# Altium PCB sensor_good.PcbDoc (part 1 of 3)
Units mil, origin at the board's own origin, x right, y up, seen from the top; angles counter-clockwise.
Board outline 3543.31 x 2755.91 mil, 6 copper layers (TOP, GND1, Sig1, Sig2, GND2, BOT), stack 32.112 mil thick; 126 components, 166 nets, 710 pads, 273 vias.
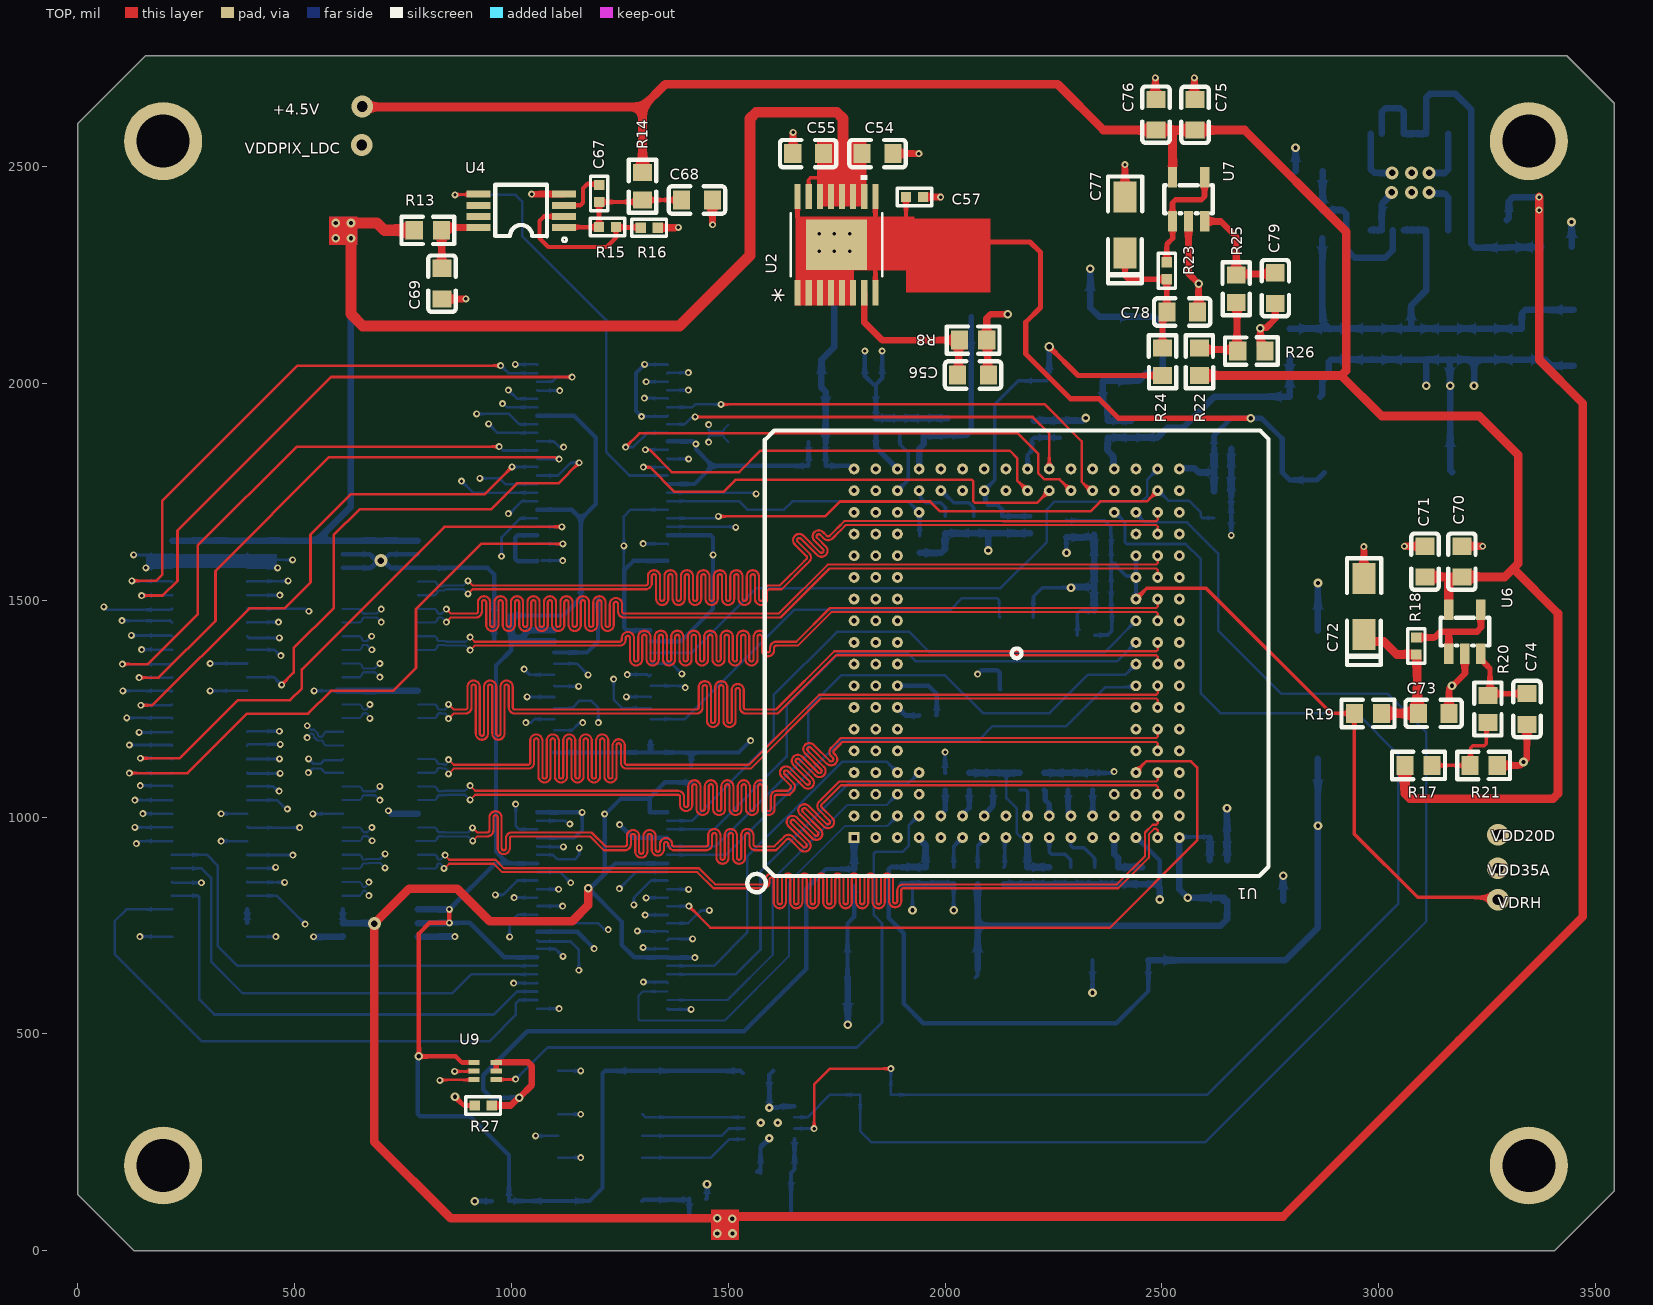
[diagram p0: TOP view]
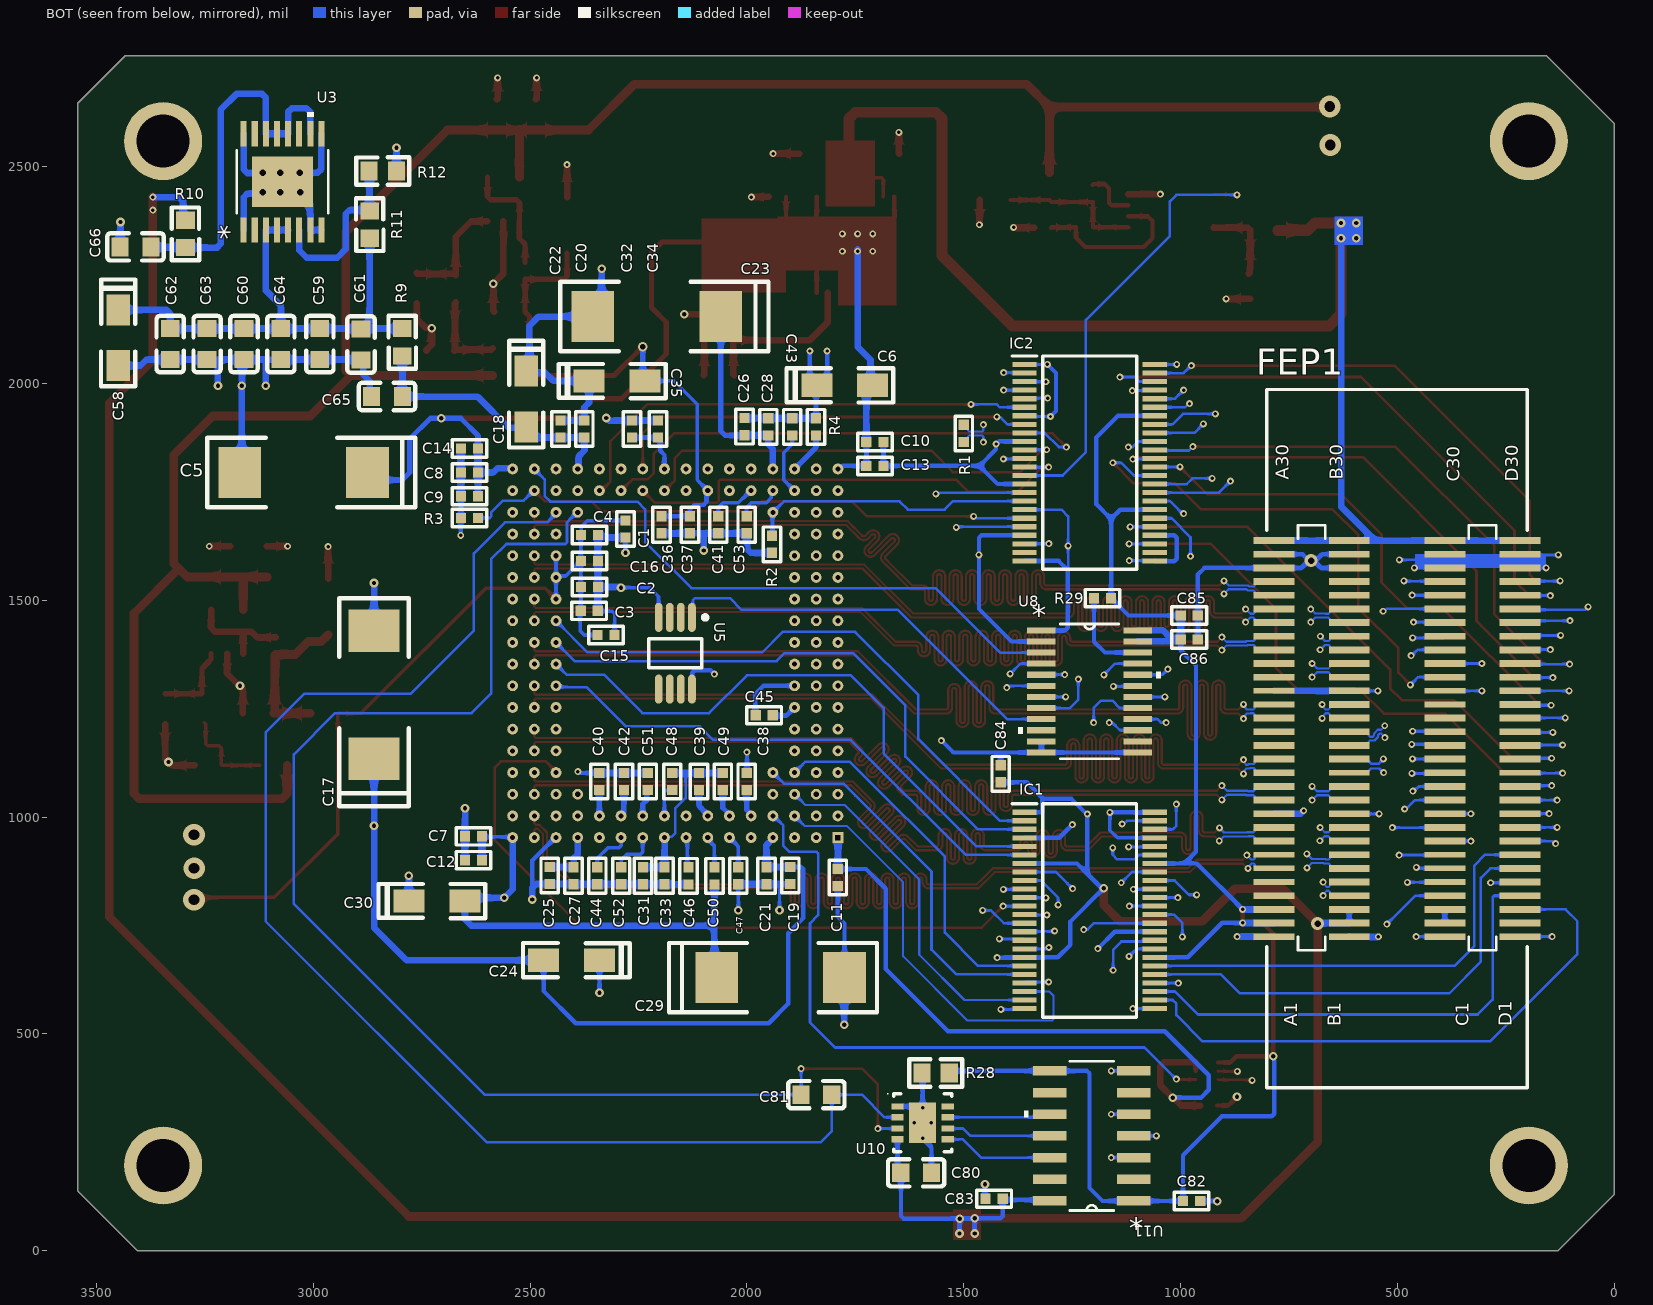
[diagram p1: BOT view, seen from below]
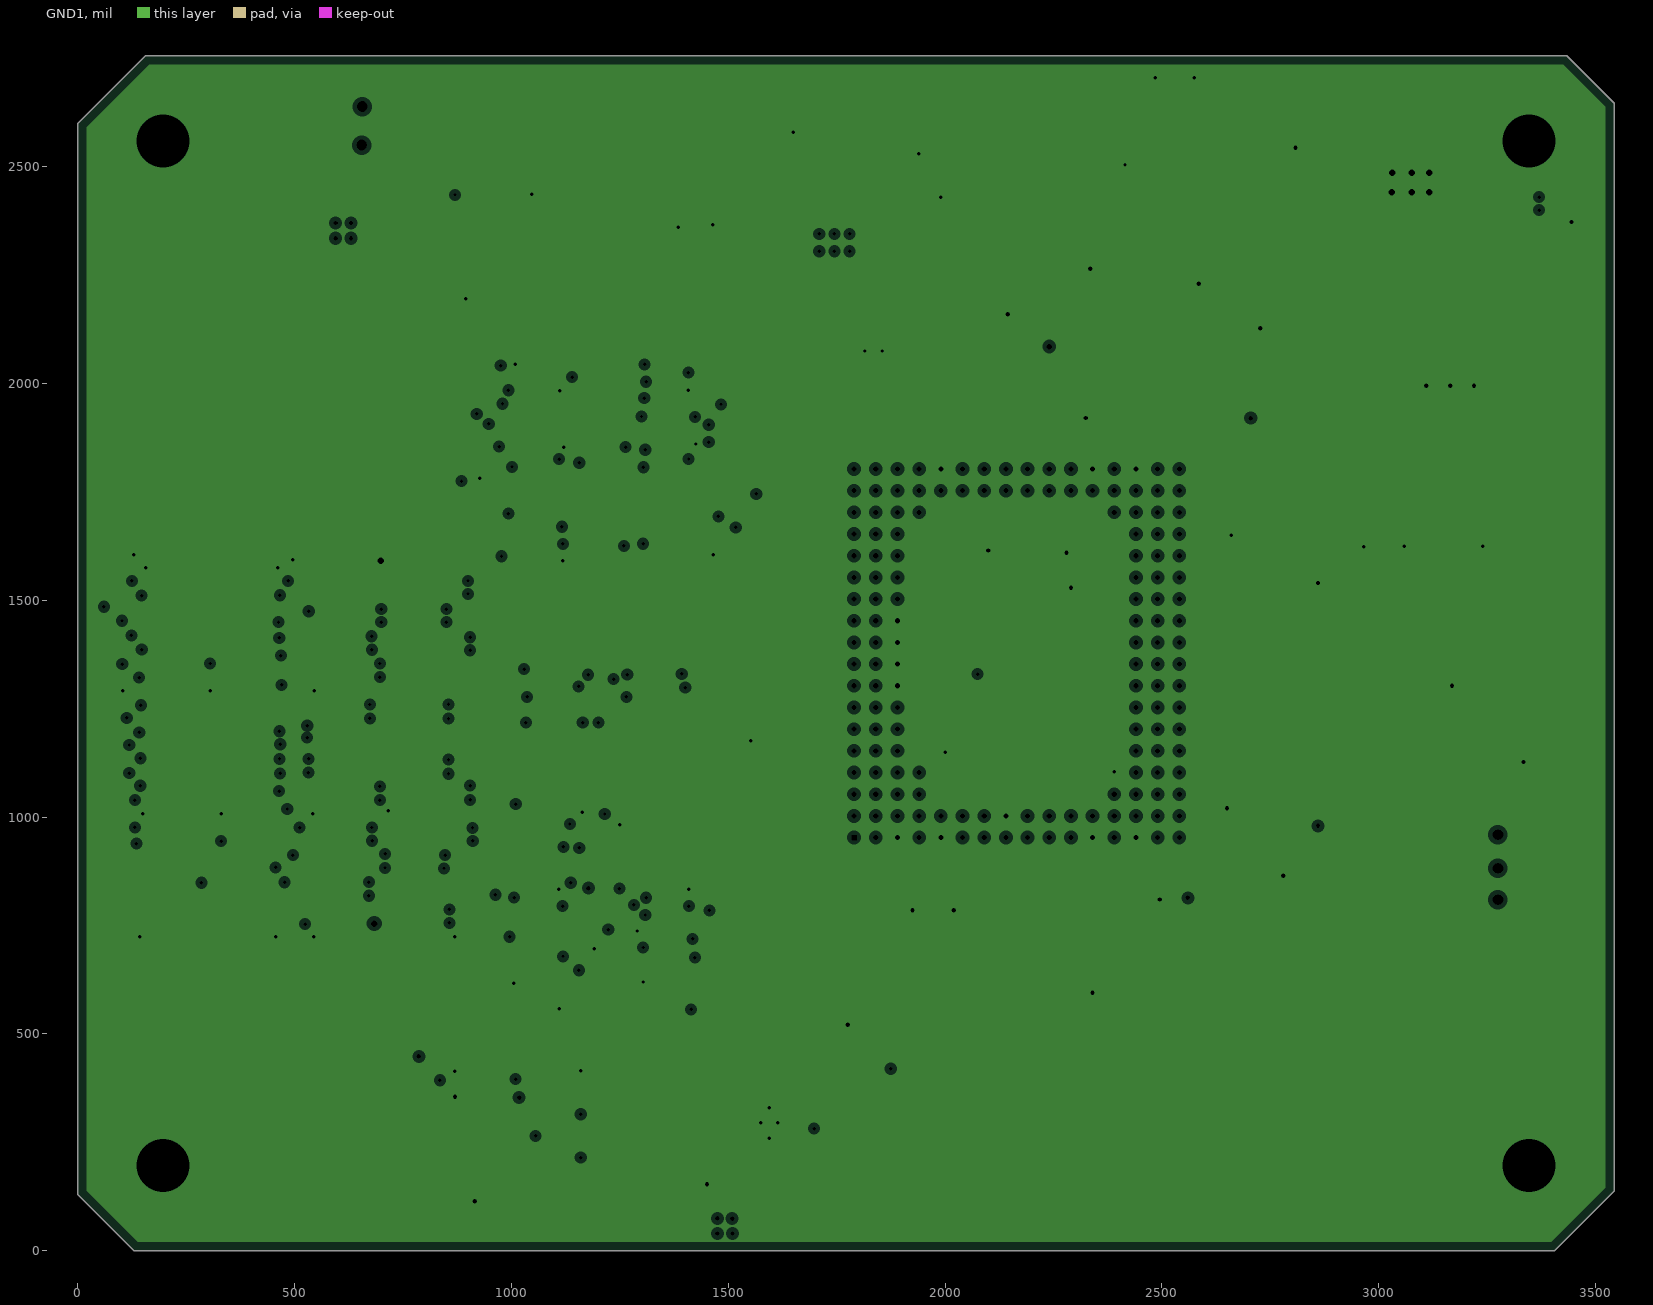
[diagram p2: GND1, clearances drawn from the general rule]
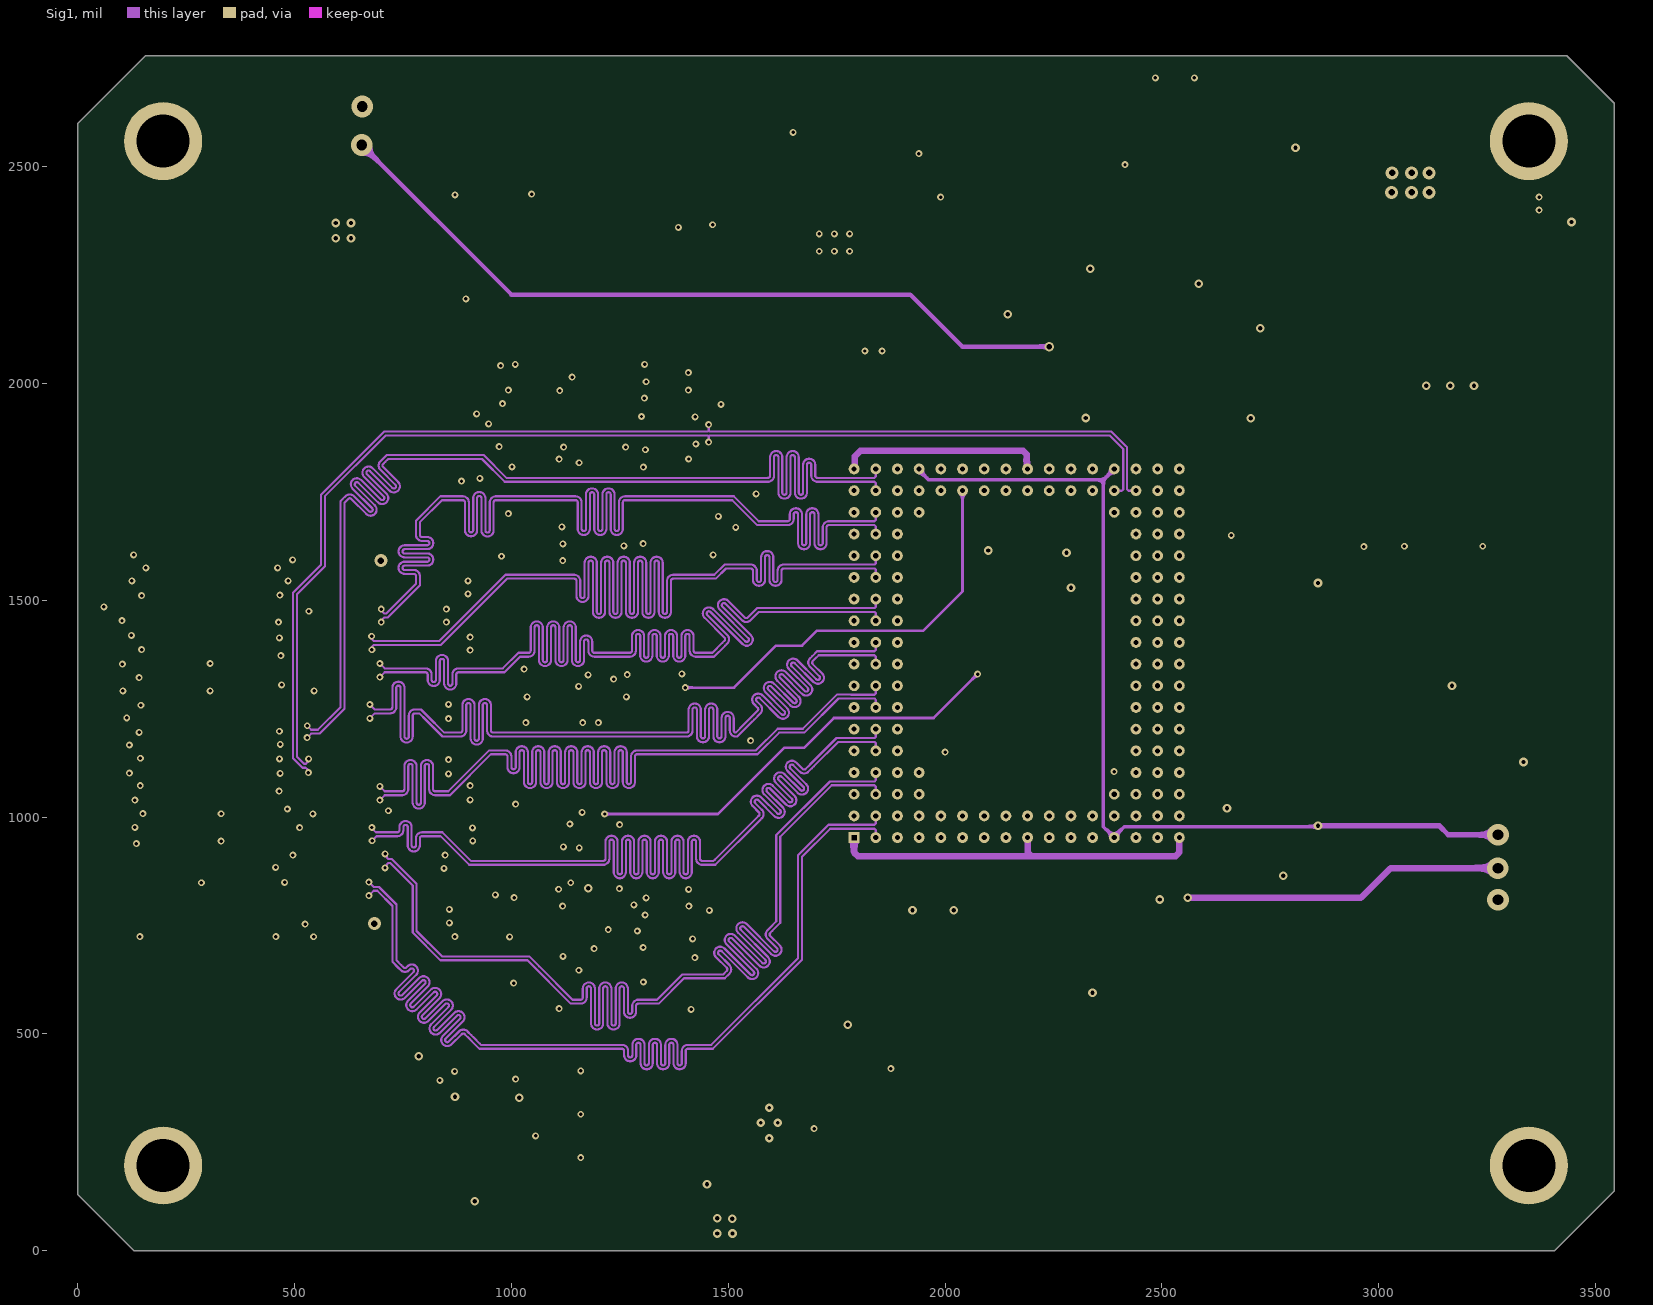
[diagram p3: Sig1]
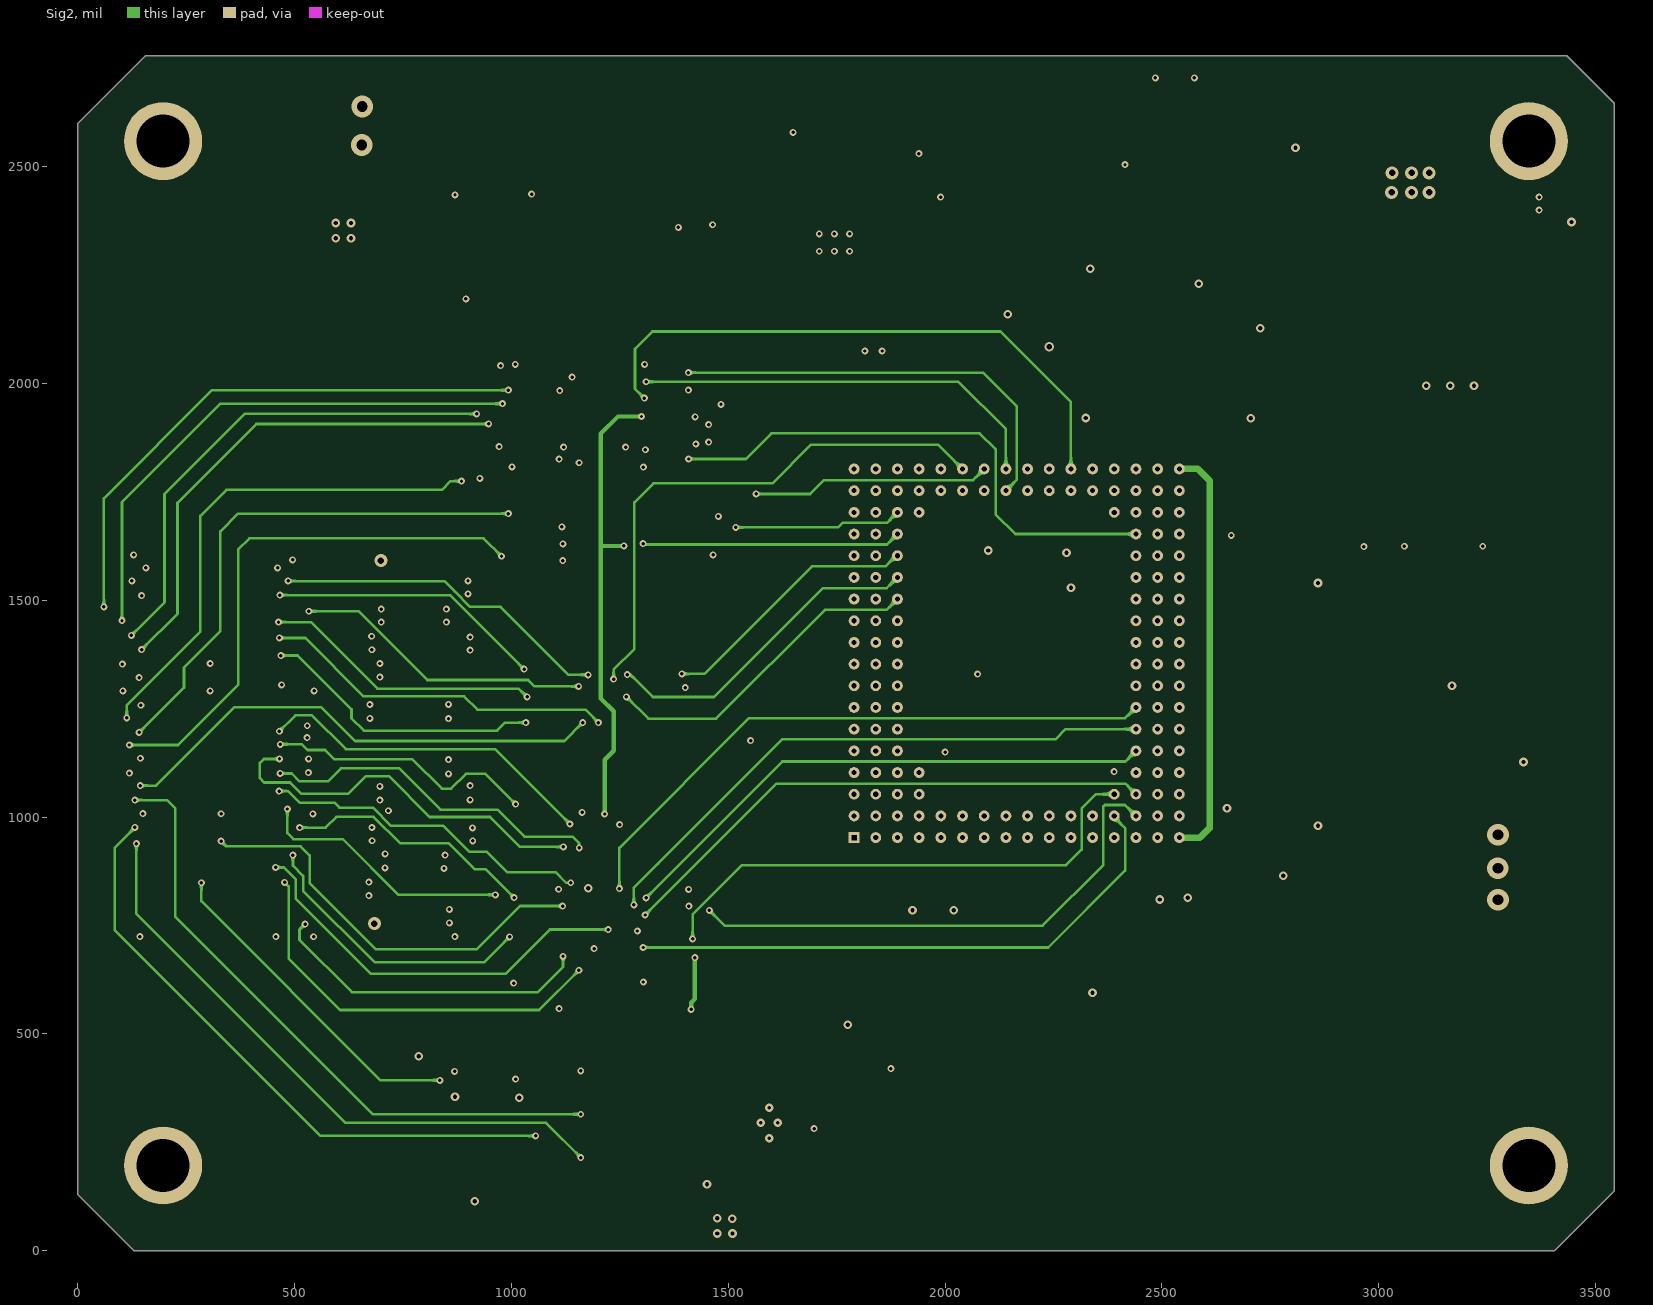
[diagram p4: Sig2]
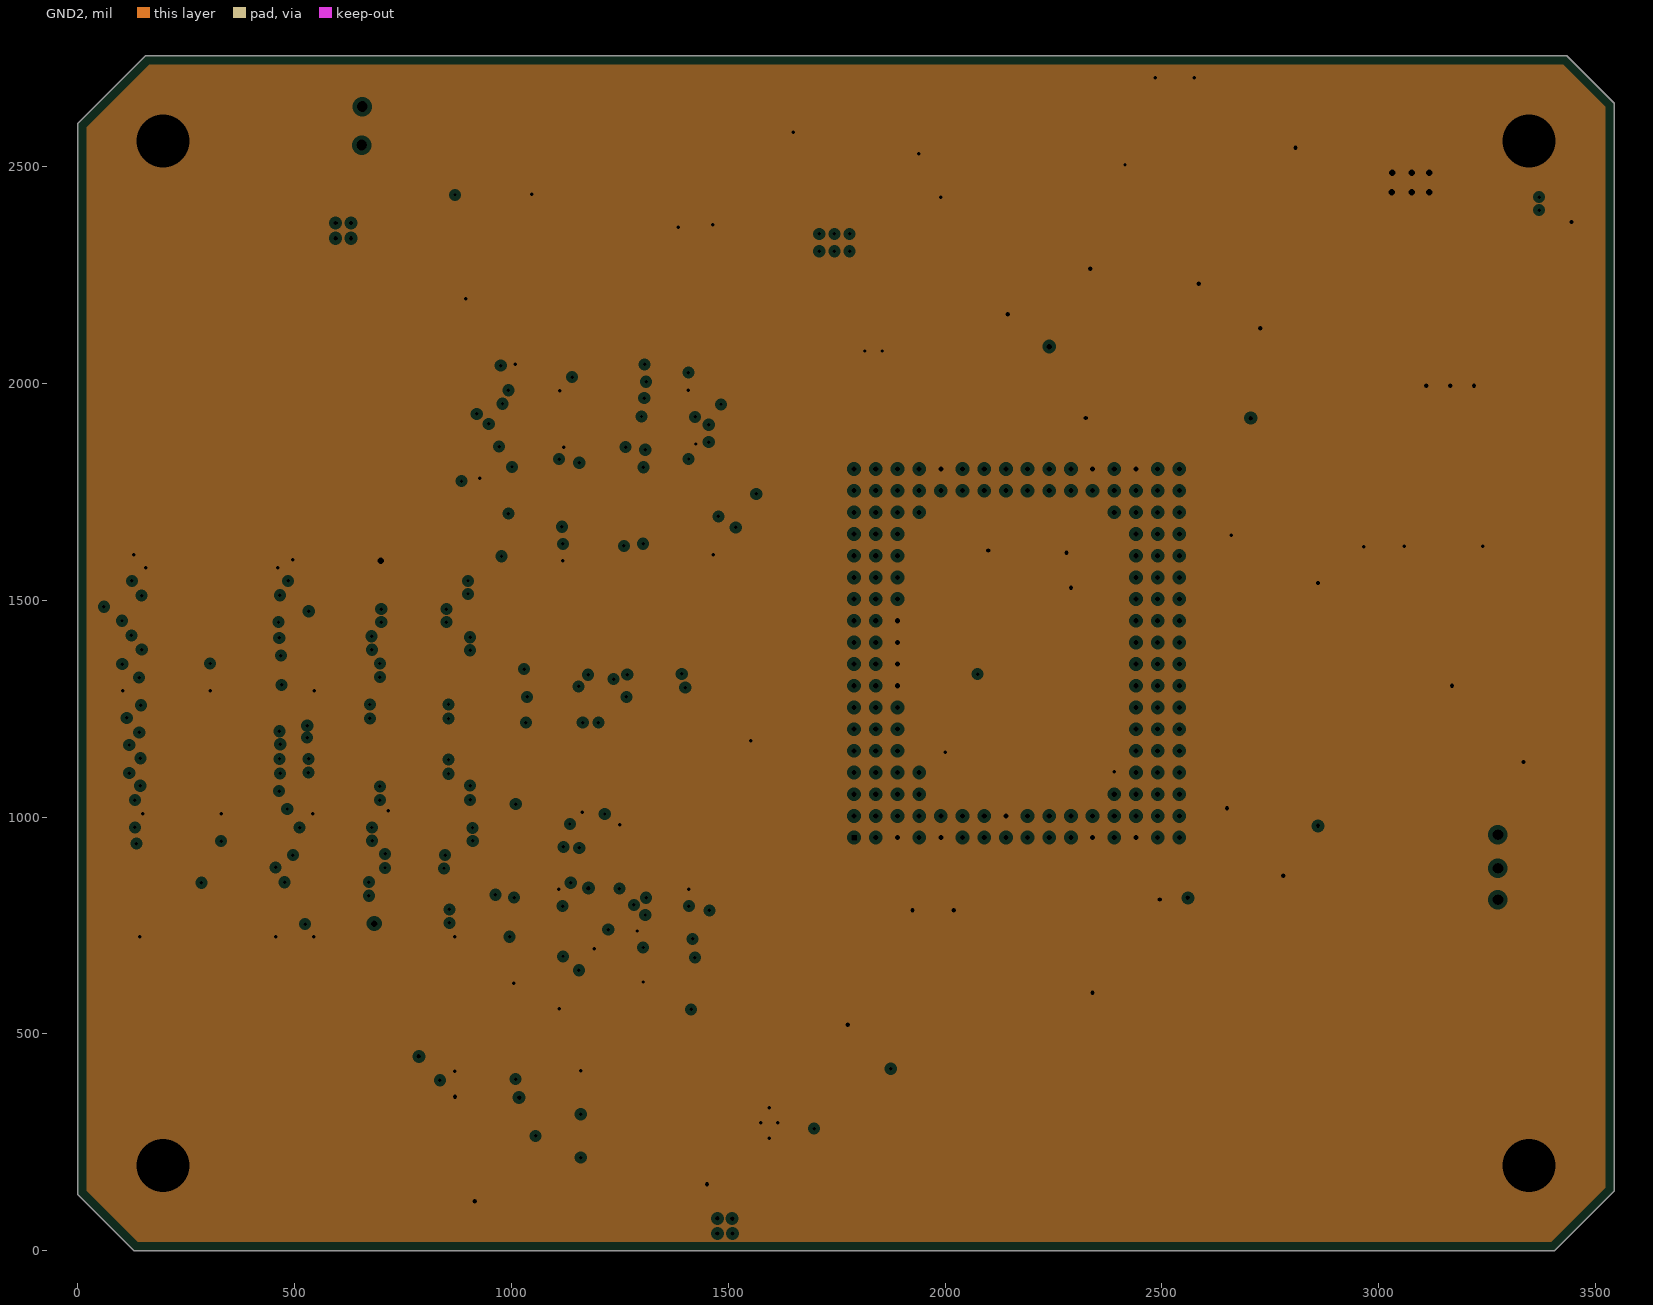
[diagram p5: GND2, clearances drawn from the general rule]

## Layer stack, top to bottom
Top Solder: solder mask 0.4, Solder Resist, Dk 3.5
TOP: signal copper 1.4
Dielectric 2: prepreg 2.8, PP-006, Dk 4.1
GND1: plane copper 1.378, net GND
Dielectric 4: prepreg 2.8, PP-006, Dk 4.1
Sig1: signal copper 1.378
Dielectric 1: dielectric 12.6, FR-4, Dk 4.8
Sig2: signal copper 1.378
Dielectric 5: prepreg 2.8, PP-006, Dk 4.1
GND2: plane copper 1.378, net GND
Dielectric 3: prepreg 2.8, PP-006, Dk 4.1
BOT: signal copper 1.4
Bottom Solder: solder mask 0.4, Solder Resist, Dk 3.5

## Board outline
130,0 0,130 0,2599.45 156.46,2755.91 3433.54,2755.91 3543.31,2646.14 3543.31,137.76 3405.55,0

## Design rules (kind name [scope] priority, off if disabled: settings)
Clearance Clearance_1 [All vs InNet('GND')] p1: gap=6 ignorepadtopadclearanceinfootprint=FALSE except(0: Arc-Hole Track-Hole Via-Hole Fill-Hole Poly-Hole Region-Hole Text-Hole; 4: Arc-Arc Arc-Track Arc-SMDPad Arc-THPad Track-Track Track-SMDPad Track-THPad; 5: SMDPad-SMDPad SMDPad-THPad THPad-THPad; 8: SMDPad-Hole)
Clearance [All] p2: gap=6 ignorepadtopadclearanceinfootprint=FALSE except(0: Arc-Hole Track-Hole Via-Hole Fill-Hole Poly-Hole Region-Hole Text-Hole; 4: Arc-Arc Arc-Track Track-Track; 5: Arc-SMDPad Arc-THPad Track-SMDPad Track-THPad; 8: SMDPad-Hole)
DiffPairsRouting [All] p1: maxlimit=10 minlimit=4 mostfreqgap=4 toplayer_minwidth=5 toplayer_maxwidth=15 toplayer_prefwidth=5 midlayer1_minwidth=5 midlayer1_maxwidth=15 midlayer1_prefwidth=5 midlayer2_minwidth=5 midlayer2_maxwidth=15 midlayer2_prefwidth=5 bottomlayer_minwidth=5 bottomlayer_maxwidth=15 bottomlayer_prefwidth=5 maxuncoupledlength=500
FanoutControl Fanout_Default [All] p5: bgadir=Out bgaviamode=Closest fanoutstyle=Rows fanoutdirection=OutOnly viagrid=1 // Fanout_Default (Default Rule)
HoleSize [All] p1: absolutevalues=TRUE maxlimit=200 minlimit=1 maxpercent=80.000 minpercent=20.000
HoleToHoleClearance [All] p1: gap=6 allowstackedmicrovias=TRUE
MinimumSolderMaskSliver [All] p1: minsoldermaskwidth=1.5
PlaneClearance diff [InNetClass('Diff')] p1: clearance=8
PlaneClearance Power [InNetClass('PWR')] p2: clearance=12
PlaneClearance signal [All] p3: clearance=10
PlaneConnect [All] p1: planeconnectstyle=Direct reliefexpansion=20 reliefentries=4 reliefconductorwidth=10 reliefairgap=10
PolygonConnect [All] p1: connectstyle=Direct reliefconductorwidth=10 reliefentries=4 polygonreliefangle="90 Angle" airgapwidth=10
RoutingVias [All] p1: holewidth=8 width=16 viastyle="Through Hole" minholewidth=6 minwidth=12 maxholewidth=28 maxwidth=50
SilkToSilkClearance [All] p1: silktosilkclearance=0
SilkToSolderMaskClearance [IsPad] p1: minsilkscreentomaskgap=0 clearancetoexposedcopper=TRUE
SolderMaskExpansion [All] p1: expansion=4 istentingtop=FALSE
UnRoutedNet [All] p1: checkbadconnections=TRUE
Width [All] p1: maxlimit=40 minlimit=5 preferedwidth=6 minimp=50.000000 maximp=50.000000 favimp=50.000000
20 further rules are at their usual default settings.

## Classes and differential pairs
net class Diff: CLKIN_N CLKIN_P CLKOUT_N CLKOUT_P OUT0_BOT_N OUT0_BOT_P OUT0_TOP_N OUT0_TOP_P OUT1_BOT_N OUT1_BOT_P OUT1_TOP_N OUT1_TOP_P OUT2_BOT_N OUT2_BOT_P OUT2_TOP_N OUT2_TOP_P OUT3_BOT_N OUT3_BOT_P OUT3_TOP_N OUT3_TOP_P OUT4_BOT_N OUT4_BOT_P OUT4_TOP_N OUT4_TOP_P OUT5_BOT_N OUT5_BOT_P OUT5_TOP_N OUT5_TOP_P OUT6_BOT_N OUT6_BOT_P OUT6_TOP_N OUT6_TOP_P OUT7_BOT_N OUT7_BOT_P OUT7_TOP_N OUT7_TOP_P
component class Sensor: C1 C2 C3 C4 C5 C6 C7 C8 C9 C10 C11 C12 C13 C14 C15 C16 C17 C18 C19 C20 C21 C22 C23 C24 C25 C26 C27 C28 C29 C30 C31 C32 C33 C34 C35 C36 C37 C38 C39 C40 C41 C42 C43 C44 C45 C46 C47 C48 C49 C50 C51 C52 C53 FEP1 q R1 R2 R3 R4
component class Sensor_Power_Supply: C54 C55 C56 C57 C58 C59 C60 C61 C62 C63 C64 C65 C66 C67 C68 C69 C70 C71 C72 C73 C74 C75 C76 C77 C78 C79 C80 C81 C82 C83 C84 C85 C86 IC1 IC2 R8 R9 R10 R11 R12 R13 R14 R15 R16 R17 R18 R19 R20 R21 R22 R23 R24 R25 R26 R27 R28 R29 U2 U3 U4 U5 U6 U7 U8 U9 U10 U11
differential pair OUT7_TOP: +OUT7_TOP_P -OUT7_TOP_N
differential pair OUT7_BOT: +OUT7_BOT_P -OUT7_BOT_N
differential pair OUT6_TOP: +OUT6_TOP_P -OUT6_TOP_N
differential pair OUT6_BOT: +OUT6_BOT_P -OUT6_BOT_N
differential pair OUT5_TOP: +OUT5_TOP_P -OUT5_TOP_N
differential pair OUT5_BOT: +OUT5_BOT_P -OUT5_BOT_N
differential pair OUT4_TOP: +OUT4_TOP_P -OUT4_TOP_N
differential pair OUT4_BOT: +OUT4_BOT_P -OUT4_BOT_N
differential pair OUT3_TOP: +OUT3_TOP_P -OUT3_TOP_N
differential pair OUT3_BOT: +OUT3_BOT_P -OUT3_BOT_N
differential pair OUT2_TOP: +OUT2_TOP_P -OUT2_TOP_N
differential pair OUT2_BOT: +OUT2_BOT_P -OUT2_BOT_N
differential pair OUT1_TOP: +OUT1_TOP_P -OUT1_TOP_N
differential pair OUT1_BOT: +OUT1_BOT_P -OUT1_BOT_N
differential pair OUT0_TOP: +OUT0_TOP_P -OUT0_TOP_N
differential pair OUT0_BOT: +OUT0_BOT_P -OUT0_BOT_N
differential pair CLKOUT: +CLKOUT_P -CLKOUT_N
differential pair CLKIN: +CLKIN_P -CLKIN_N

## Components (designator, comment, footprint, x,y, rotation, side; value= is the part's Value field where it differs from the comment)
C1 "4.7uF" CAP0402 2280,1664.69 r90 bottom
C2 "100nF" CAP0402 2363.23,1530.91 r0 bottom
C3 "4.7uF" CAP0402 2363.86,1475.91 r0 bottom
C4 "100nF" CAP0402 2363.23,1650.91 r0 bottom
C5 "470u" CAPPM3528X210N 3020,1800 r180 bottom
C6 "100uF" CASE-A_3216 1770,1995 r0 bottom
C7 "4.7uF" CAP0402 2630.71,955.91 r180 bottom
C8 "4.7uF" CAP0402 2640,1795 r180 bottom
C9 "4.7uF" CAP0402 2640,1740 r180 bottom
C10 "4.7uF" CAP0402 1705,1865 r0 bottom
C11 "100nF" CAP0402 1790.41,860.74 r90 bottom
C12 "100nF" CAP0402 2630.71,900.91 r180 bottom
C13 "100nF" CAP0402 1705,1810 r0 bottom
C14 "100nF" CAP0402 2640,1850 r180 bottom
C15 "4.7uF" CAP0402 2325,1420 r0 bottom
C16 "100nF" CAP0402 2363.23,1590.91 r0 bottom
C17 "470u" CAPPM3528X210N 2855,1280 r270 bottom
C18 "100uF" CASE-A_3216 2510,1960 r90 bottom
C19 "4.7uF" CAP0402 1900,865.31 r90 bottom
C20 "4.7uF" CAP0402 2375,1895 r270 bottom
C21 "100nF" CAP0402 1955,865 r90 bottom
C22 "100nF" CAP0402 2430,1895 r270 bottom
C23 "470uF" CAPPM3528X210N 2205.4,2159.45 r180 bottom
C24 "100uF" CASE-A_3216 2409,671 r180 bottom
C25 "4.7uF" CAP0402 2455,865.31 r90 bottom
C26 "4.7uF" CAP0402 2005.71,1900.59 r270 bottom
C27 "100nF" CAP0402 2400,865 r90 bottom
C28 "100nF" CAP0402 1950.71,1900.08 r270 bottom
C29 "470u" CAPPM3528X210N 1925,625 r0 bottom
C30 "100uF" CASE-A_3216 2710.71,805.91 r0 bottom
C31 "4.7uF" CAP0402 2240,865 r90 bottom
C32 "4.7uF" CAP0402 2265,1895 r270 bottom
C33 "100nF" CAP0402 2190,865 r90 bottom
C34 "100nF" CAP0402 2205,1895 r270 bottom
C35 "100uF" CASE-A_3216 2295,2005 r0 bottom
C36 "4.7uF" CAP0402 2197.07,1674.25 r90 bottom
C37 "100nF" CAP0402 2131.62,1674.25 r90 bottom
C38 "100nF" CAP0402 2000.71,1082.33 r90 bottom
C39 "1uF" CAP0402 2110.71,1082.33 r90 bottom
C40 "1uF" CAP0402 2340.48,1082.33 r90 bottom
C41 "100nF" CAP0402 2066.16,1674.25 r270 bottom
C42 "1uF" CAP0402 2283.86,1082.33 r90 bottom
C43 "100nF" CAP0402 1895.71,1900.08 r90 bottom
C44 "1uF" CAP0402 2345,865 r270 bottom
C45 "100nF" CAP0402 1960.31,1235 r0 bottom
C46 "1uF" CAP0402 2135,864.69 r270 bottom
C47 "100nF" CAP0402 2020,865 r270 bottom
C48 "100nF" CAP0402 2172.29,1082.33 r90 bottom
C49 "100nF" CAP0402 2055.71,1082.33 r90 bottom
C50 "1uF" CAP0402 2075,864.69 r270 bottom
C51 "100nF" CAP0402 2228.59,1082.33 r90 bottom
C52 "100nF" CAP0402 2290,865 r270 bottom
C53 "100nF" CAP0402 2000.71,1674.25 r270 bottom
C54 "4.7uF" C0603 1844.25,2530.16 r180 top
C55 "10uF" C0603 1684.25,2530.16 r0 top
C56 "100nF" C0603 2064.69,2019.61 r180 top
C57 "10uF" CAP0402 1929.69,2430.16 r180 top
C58 "150uF" CASE-A_3216 3451,2101 r90 bottom
C59 "1uF" C0603 2985,2091 r90 bottom
C60 "1uF" C0603 3160,2091 r90 bottom
C61 "1uF" C0603 2890,2090 r90 bottom
C62 "1uF" C0603 3330,2091 r90 bottom
C63 "1uF" C0603 3245,2091 r90 bottom
C64 "1uF" C0603 3075,2091 r90 bottom
C65 "1uF" C0603 2830,1970 r180 bottom
C66 "10uF" C0603 3410,2315 r180 bottom
C67 "10nF" CAP0402 1202.5,2438.2 r90 top
C68 "10uF" C0603 1427.93,2423.2 r0 top
C69 "1uF" C0603 840,2230.43 r90 top
C70 "100nF" C0603 3191.89,1589.37 r270 top
C71 "4.7uF" C0603 3106.89,1589.37 r270 top
C72 "33uF" CASE-A_3216 2966.89,1489.92 r270 top
C73 "4.7uF" C0603 3126.89,1239.37 r180 top
C74 "4.7uF" C0603 3341.89,1249.37 r90 top
C75 "100nF" C0603 2576.55,2619.57 r270 top
C76 "4.7uF" C0603 2486.55,2620 r270 top
C77 "33uF" CASE-A_3216 2416,2370 r270 top
C78 "4.7uF" C0603 2546.99,2165 r180 top
C79 "4.7uF" C0603 2761.55,2220 r90 top
C80 "100nF" C0603 1610,180 r0 bottom
C81 "2200p" C0603 1840,360 r0 bottom
C82 "1uF" CAP0402 974.69,115 r0 bottom
C83 "1uF" CAP0402 1430,120 r180 bottom
C84 "100nF" CAP0402 1415,1100 r270 bottom
C85 "1uF" CAP0402 980,1465 r0 bottom
C86 "100nF" CAP0402 980,1410 r0 bottom
FEP1 "FEP" "FEP-X2 NO PAD" 500.94,488.19 r0 bottom locked
IC1 "74ALVC164245DGG,11" SOP50P810X120-48N 1210,785 r180 bottom
IC2 "74ALVC164245DGG,11" SOP50P810X120-48N 1209.92,1817.32 r180 bottom
R1 "100R  1%" RES0402 1500,1885 r90 bottom value=10K
R2 "1k" RES0402 1942.11,1629.21 r270 bottom value=10K
R3 "0R" RES0402 2640,1690 r0 bottom value=10K
R4 "0R" RES0402 1840.71,1900.08 r90 bottom value=10K
R8 "10k 1%" R0603 2064.69,2100.16 r180 top
R9 "0R" R0603 2795,2095 r270 bottom
R10 "0R" R0603 3295,2345 r270 bottom
R11 "1.3k" R0603 2870,2366.49 r270 bottom
R12 "2k" R0603 2840,2490 r0 bottom
R13 "0R" R0603 807.5,2353.2 r0 top
R14 "0R" R0603 1302.5,2454.7 r90 top
R15 "2.7k" RES0402 1221.57,2361 r180 top
R16 "1k" RES0402 1317.79,2359.21 r180 top
R17 "18k" R0603 3091.89,1119.37 r180 top
R18 "0R" RES0402 3086.89,1394.69 r270 top
R19 "0R" R0603 2975.4,1239.37 r180 top
R20 "47k" R0603 3251.89,1249.37 r90 top
R21 "100k" R0603 3241.89,1119.37 r180 top
R22 "100k" R0603 2586.55,2050 r270 top
R23 "0R" RES0402 2511.55,2260 r270 top
R24 "0R" R0603 2501.55,2050 r270 top
R25 "47k" R0603 2671.55,2218.51 r90 top
R26 "22k" R0603 2706.55,2075 r180 top
R27 "18k" RES0402 935,335 r0 top
R28 "18k" R0603 1565,410 r180 bottom
R29 "18k" RES0402 1180,1505 r180 bottom
U1 "G200BSI" "ANDON SOCKET" 2165.35,1377.95 r90 top locked
U2 "lt3083efe#trpbf" TSSOP-16_FE/BB 1749.69,2320.16 r90 top
U3 "lt1764efe#trpbf" TSSOP-16_FE/BB 3071,2465 r90 bottom
U4 "LT1962EMS8#PBF" MSOP-8_L3.0-W3.0-P0.65-LS5.0-TL 1022.5,2398.2 r180 top
U5 "DS18B20U+" MAXM-U8+1_N 2165.35,1377.95 r270 bottom
U6 "LT6220IS5" SOT23-5 3198.67,1427.75 r0 top
U7 "LT6220IS5" SOT23-5 2561.55,2425 r0 top
U8 "AVC8T245PWR-D" PW24 1210,1290 r180 bottom
U9 "TXS0101DRLR" DRL6 939.41,414.69 r0 top
U10 "MAX6627MTA+T" MAXM-T833+2_V 1595,295 r180 bottom
U11 "TXS0104ED" D14 1205,265 r0 bottom

## Footprints (in the part's own frame and the unit in brackets; to place one, negate y for a bottom-side part, rotate by r counter-clockwise, add the part's x,y. Pads: shape width x height; smd on the part's side, far side on the other; paste and mask are expansions set on the pad)
"ANDON SOCKET" [mm] "10-18-04A-153-414T4-R27-L14"
  rect 0.635x0.635 hole 0.3 square: A1(-10.795,9.525)
  round 0.635 hole 0.3: A2(-9.525,9.525) A3(-8.255,9.525) A4(-6.985,9.525) A5(-5.715,9.525) A6(-4.445,9.525) A7(-3.175,9.525) A8(-1.905,9.525) A9(-0.635,9.525) A10(0.635,9.525) A11(1.905,9.525) A12(3.175,9.525) A13(4.445,9.525) A14(5.715,9.525) A15(6.985,9.525) A16(8.255,9.525) A17(9.525,9.525) A18(10.795,9.525) B1(-10.795,8.255) B2(-9.525,8.255) B3(-8.255,8.255) B4(-6.985,8.255) B5(-5.715,8.255) B6(-4.445,8.255) B7(-3.175,8.255) B8(-1.905,8.255) B9(-0.635,8.255) B10(0.635,8.255) B11(1.905,8.255) B12(3.175,8.255) B13(4.445,8.255) B14(5.715,8.255) B15(6.985,8.255) B16(8.255,8.255) B17(9.525,8.255) B18(10.795,8.255) C1(-10.795,6.985) C2(-9.525,6.985) C3(-8.255,6.985) C4(-6.985,6.985) C5(-5.715,6.985) C6(-4.445,6.985) C7(-3.175,6.985) C8(-1.905,6.985) C9(-0.635,6.985) C10(0.635,6.985) C11(1.905,6.985) C12(3.175,6.985) C13(4.445,6.985) C14(5.715,6.985) C15(6.985,6.985) C16(8.255,6.985) C17(9.525,6.985) C18(10.795,6.985) D1(-10.795,5.715) D2(-9.525,5.715) D3(-8.255,5.715) D4(-6.985,5.715) D16(8.255,5.715) D17(9.525,5.715) D18(10.795,5.715) E1(-10.795,4.445) E2(-9.525,4.445) E17(9.525,4.445) E18(10.795,4.445) F1(-10.795,3.175) F2(-9.525,3.175) F17(9.525,3.175) F18(10.795,3.175) G1(-10.795,1.905) G2(-9.525,1.905) G17(9.525,1.905) G18(10.795,1.905) H1(-10.795,0.635) H2(-9.525,0.635) H17(9.525,0.635) H18(10.795,0.635) J1(-10.795,-0.635) J2(-9.525,-0.635) J17(9.525,-0.635) J18(10.795,-0.635) K1(-10.795,-1.905) K2(-9.525,-1.905) K17(9.525,-1.905) K18(10.795,-1.905) L1(-10.795,-3.175) L2(-9.525,-3.175) L17(9.525,-3.175) L18(10.795,-3.175) M1(-10.795,-4.445) M2(-9.525,-4.445) M17(9.525,-4.445) M18(10.795,-4.445) N1(-10.795,-5.715) N2(-9.525,-5.715) N3(-8.255,-5.715) N16(8.255,-5.715) N17(9.525,-5.715) N18(10.795,-5.715) P1(-10.795,-6.985) P2(-9.525,-6.985) P3(-8.255,-6.985) P4(-6.985,-6.985) P5(-5.715,-6.985) P6(-4.445,-6.985) P7(-3.175,-6.985) P8(-1.905,-6.985) P9(-0.635,-6.985) P10(0.635,-6.985) P11(1.905,-6.985) P12(3.175,-6.985) P13(4.445,-6.985) P14(5.715,-6.985) P15(6.985,-6.985) P16(8.255,-6.985) P17(9.525,-6.985) P18(10.795,-6.985) R1(-10.795,-8.255) R2(-9.525,-8.255) R3(-8.255,-8.255) R4(-6.985,-8.255) R5(-5.715,-8.255) R6(-4.445,-8.255) R7(-3.175,-8.255) R8(-1.905,-8.255) R9(-0.635,-8.255) R10(0.635,-8.255) R11(1.905,-8.255) R12(3.175,-8.255) R13(4.445,-8.255) R14(5.715,-8.255) R15(6.985,-8.255) R16(8.255,-8.255) R17(9.525,-8.255) R18(10.795,-8.255) T1(-10.795,-9.525) T2(-9.525,-9.525) T3(-8.255,-9.525) T4(-6.985,-9.525) T5(-5.715,-9.525) T6(-4.445,-9.525) T7(-3.175,-9.525) T8(-1.905,-9.525) T9(-0.635,-9.525) T10(0.635,-9.525) T11(1.905,-9.525) T12(3.175,-9.525) T13(4.445,-9.525) T14(5.715,-9.525) T15(6.985,-9.525) T16(8.255,-9.525) T17(9.525,-9.525) T18(10.795,-9.525)
  silkscreen extent -14,-14.75 13.05,15.78
C0603 [mm]
  rect 1x1.1 smd: 1(-0.9,0) 2(0.9,0)
  silkscreen extent -1.65,-0.8 1.65,0.8
CAP0402 [mm]
  rect 0.6x0.6 smd: 1(-0.5,0) 2(0.5,0)
  silkscreen extent -1.02,-0.51 1.02,0.51, body extent -0.55,-0.3 0.55,0.3, height 0.6
CAPPM3528X210N [mm]
  rect 2.5x3 smd: 1(3.683,-0.127) 2(-3.81,-0.127)
  silkscreen extent -5.71,-2.16 6.48,1.91
CASE-A_3216 [mil]
  rect 71.5x53.5 smd: 1(69,-1) 2(-60,-1)
  silkscreen extent -107,-40 139,39
D14 [mil]
  rect 78x22 smd: 1(-97,150) 2(-97,100) 3(-97,50) 4(-97,0) 5(-97,-50) 6(-97,-100) 7(-97,-150) 8(97,-150) 9(97,-100) 10(97,-50) 11(97,0) 12(97,50) 13(97,100) 14(97,150)
  silkscreen extent -51,-172 156,172, body extent 0,0 10,10, height 10
DRL6 [mm]
  rect 0.654x0.301 smd: 1(-0.65,0.5) 2(-0.65,0) 3(-0.65,-0.5) 4(0.65,-0.5) 5(0.65,0) 6(0.65,0.5)
  body extent 0,0 0.25,0.25, height 0.25
"FEP-X2 NO PAD" [mm]
  rect 2.4x0.4 smd: A1(7.2,-6) A2(7.2,-6.8) A3(7.2,-7.6) A4(7.2,-8.4) A8(7.2,-11.6) A9(7.2,-12.4) A10(7.2,-13.2) A11(7.2,-14) A12(7.2,-14.8) A13(7.2,-15.6) A14(7.2,-16.4) A15(7.2,-17.2) A16(7.2,-18) A17(7.2,-18.8) A20(7.2,-21.2) A21(7.2,-22) A22(7.2,-22.8) A23(7.2,-23.6) A24(7.2,-24.4) A25(7.2,-25.2) A26(7.2,-26) A27(7.2,-26.8) A28(7.2,-27.6) A29(7.2,-28.4) A30(7.2,-29.2) B1(2.8,-6) B2(2.8,-6.8) B3(2.8,-7.6) B4(2.8,-8.4) B5(2.8,-9.2) B6(2.8,-10) B7(2.8,-10.8) B8(2.8,-11.6) B9(2.8,-12.4) B10(2.8,-13.2) B11(2.8,-14) B12(2.8,-14.8) B14(2.8,-16.4) B15(2.8,-17.2) B16(2.8,-18) B17(2.8,-18.8) B18(2.8,-19.6) B19(2.8,-20.4) B20(2.8,-21.2) B21(2.8,-22) B22(2.8,-22.8) B23(2.8,-23.6) B24(2.8,-24.4) B25(2.8,-25.2) B26(2.8,-26) B27(2.8,-26.8) B28(2.8,-27.6) B29(2.8,-28.4) B30(2.8,-29.2) C1(-2.8,-6) C2(-2.8,-6.8) C3(-2.8,-7.6) C4(-2.8,-8.4) C8(-2.8,-11.6) C9(-2.8,-12.4) C10(-2.8,-13.2) C11(-2.8,-14) C12(-2.8,-14.8) C13(-2.8,-15.6) C14(-2.8,-16.4) C15(-2.8,-17.2) C16(-2.8,-18) C17(-2.8,-18.8) C20(-2.8,-21.2) C21(-2.8,-22) C22(-2.8,-22.8) C23(-2.8,-23.6) C24(-2.8,-24.4) C25(-2.8,-25.2) C26(-2.8,-26) C27(-2.8,-26.8) C28(-2.8,-27.6) C29(-2.8,-28.4) C30(-2.8,-29.2) D1(-7.2,-6) D2(-7.2,-6.8) D3(-7.2,-7.6) D4(-7.2,-8.4) D5(-7.2,-9.2) D6(-7.2,-10) D7(-7.2,-10.8) D8(-7.2,-11.6) D9(-7.2,-12.4) D10(-7.2,-13.2) D11(-7.2,-14) D12(-7.2,-14.8) D14(-7.2,-16.4) D15(-7.2,-17.2) D16(-7.2,-18) D17(-7.2,-18.8) D18(-7.2,-19.6) D19(-7.2,-20.4) D20(-7.2,-21.2) D21(-7.2,-22) D22(-7.2,-22.8) D23(-7.2,-23.6) D24(-7.2,-24.4) D25(-7.2,-25.2) D26(-7.2,-26) D27(-7.2,-26.8) D28(-7.2,-27.6) D29(-7.2,-28.4) D30(-7.2,-29.2)
  rect 2.4x0.33 smd: A5(7.2,-9.2) A6(7.2,-10) A7(7.2,-10.8) A18(7.2,-19.6) A19(7.2,-20.4) B13(2.8,-15.6) C5(-2.8,-9.2) C6(-2.8,-10) C7(-2.8,-10.8) C18(-2.8,-19.6) C19(-2.8,-20.4) D13(-7.2,-15.6)
  silkscreen extent -7.62,-38.05 7.62,2.85
MAXM-T833+2_V [mil]
  rect 28.5x14.5 smd: 1(-58,38) 2(-58,13) 3(-58,-13) 4(-58,-38) 5(58,-38) 6(58,-13) 7(58,13) 8(58,38)
  rect 62.5x93.5 smd: 9(0,0)
  silkscreen extent -81,-67 67,67
MAXM-U8+1_N [mm] "SOP, 8-Leads, Body 3x3mm, Pitch 0.65mm, IPC Medium Density"
  oval 1.7x0.45 smd: 1(-2.1,0.975) 2(-2.1,0.325) 3(-2.1,-0.325) 4(-2.1,-0.975) 5(2.1,-0.975) 6(2.1,-0.325) 7(2.1,0.325) 8(2.1,0.975)
  silkscreen extent -2.22,-1.55 0.85,1.87, body extent -1.55,-1.55 1.55,1.55, height 1.1
MSOP-8_L3.0-W3.0-P0.65-LS5.0-TL [mil]
  rect 55x16 smd: 1(-98.5,38.39) 2(-98.5,12.8) 3(-98.5,-12.8) 4(-98.5,-38.39) 5(98.5,-38.39) 6(98.5,-12.8) 7(98.5,12.8) 8(98.5,38.39)
  silkscreen extent -105,-60 60,72
PW24 [mil]
  rect 66x14 smd: 1(-111,140.75) 2(-111,115.16) 3(-111,89.57) 4(-111,63.98) 5(-111,38.39) 6(-111,12.8) 7(-111,-12.8) 8(-111,-38.39) 9(-111,-63.98) 10(-111,-89.57) 11(-111,-115.16) 12(-111,-140.75) 13(111,-140.75) 14(111,-115.16) 15(111,-89.57) 16(111,-63.98) 17(111,-38.39) 18(111,-12.8) 19(111,12.8) 20(111,38.39) 21(111,63.98) 22(111,89.57) 23(111,115.16) 24(111,140.75)
  silkscreen extent -164,-156 164,156, body extent 0,0 10,10, height 10
R0603 [mm]
  rect 1x1.1 smd: 1(-0.8,0) 2(0.8,0)
  silkscreen extent -1.55,-0.8 1.55,0.81
RES0402 [mm]
  rect 0.6x0.6 smd: 1(-0.5,0) 2(0.5,0)
  silkscreen extent -1.02,-0.51 1.02,0.51, body extent -0.55,-0.3 0.55,0.3, height 0.6
SOP50P810X120-48N [mm]
  rect 1.425x0.3 smd: 1(-3.812,5.75) 2(-3.812,5.25) 3(-3.812,4.75) 4(-3.812,4.25) 5(-3.812,3.75) 6(-3.812,3.25) 7(-3.812,2.75) 8(-3.812,2.25) 9(-3.812,1.75) 10(-3.812,1.25) 11(-3.812,0.75) 12(-3.812,0.25) 13(-3.812,-0.25) 14(-3.812,-0.75) 15(-3.812,-1.25) 16(-3.812,-1.75) 17(-3.812,-2.25) 18(-3.812,-2.75) 19(-3.812,-3.25) 20(-3.812,-3.75) 21(-3.812,-4.25) 22(-3.812,-4.75) 23(-3.812,-5.25) 24(-3.812,-5.75) 25(3.812,-5.75) 26(3.812,-5.25) 27(3.812,-4.75) 28(3.812,-4.25) 29(3.812,-3.75) 30(3.812,-3.25) 31(3.812,-2.75) 32(3.812,-2.25) 33(3.812,-1.75) 34(3.812,-1.25) 35(3.812,-0.75) 36(3.812,-0.25) 37(3.812,0.25) 38(3.812,0.75) 39(3.812,1.25) 40(3.812,1.75) 41(3.812,2.25) 42(3.812,2.75) 43(3.812,3.25) 44(3.812,3.75) 45(3.812,4.25) 46(3.812,4.75) 47(3.812,5.25) 48(3.812,5.75)
  silkscreen extent -4.52,-6.25 2.75,6.25, body extent -4.05,-6.25 4.05,6.25, height 1.2
SOT23-5 [mil]
  rect 21.7x47.2 smd: 1(-37,-51) 2(0,-51) 3(37,-51) 4(37,51) 5(-37,51)
  silkscreen extent -56,-32 56,32
TSSOP-16_FE/BB [mil]
  rect 58x14 smd: 1(-111,89.6) 2(-111,64) 3(-111,38.4) 4(-111,12.8) 5(-111,-12.8) 6(-111,-38.4) 7(-111,-64) 8(-111,-89.6) 9(111,-89.6) 10(111,-64) 11(111,-38.4) 12(111,-12.8) 13(111,12.8) 14(111,38.4) 15(111,64) 16(111,89.6)
  rect 116x141 smd paste-70: EPAD(0,0)
  silkscreen extent -72,-106 160,106, body extent 0,0 10,10, height 10

## Part data
C1 C3 C7 C8 C9 C10 C15 C19 C20 C25 C26 C31 C32 C36 C71 C73 C74 C76 C78 C79: library part 4.7u, Contributor=LCEDA_Lib, nameAlias=Value(F), spicePre=C, spiceSymbolName=C_0603_US
C2 C4 C11 C12 C13 C14 C16 C21 C22 C27 C28 C30 C33 C34 C35 C37 C38 C41 C43 C45 C47 C48 C49 C51 C52 C53 C70 C75 C80: library part 100n, Contributor=LCEDA_Lib, nameAlias=Value(F), spicePre=C, spiceSymbolName=C_0603_US
C23: library part 470u
C39 C40 C42 C44 C46 C50 C59 C60 C61 C62 C63 C64 C65 C69 C82 C83 C84 C85 C86: library part 1u, Contributor=LCEDA_Lib, nameAlias=Value(F), spicePre=C, spiceSymbolName=C_0603_US
C54 C55 C56 C57 C66 C68: library part 10u, Contributor=LCEDA_Lib, nameAlias=Value(F), spicePre=C, spiceSymbolName=C_0603_US
C58: library part 150u, Contributor=LCEDA_Lib, nameAlias=Value(F), spicePre=C, spiceSymbolName=C_Tan_SMD_A_US
C67: library part 10n, Contributor=LCEDA_Lib, nameAlias=Value(F), spicePre=C, spiceSymbolName=C_0603_US
C72 C77: library part 33u, Contributor=LCEDA_Lib, nameAlias=Value(F), spicePre=C, spiceSymbolName=C_Tan_SMD_A_US
FEP1: library part FEP-2X
IC1 IC2: "Integrated Circuit", Manufacturer_Name=Nexperia, Mouser Part Number=771-74ALVC16424, Arrow Part Number=74ALVC164245DGG,11, Arrow Price/Stock=https://www.arrow.com/en/products/74alvc164245dgg11/nexperia, Datasheet Link=https://assets.nexperia.com/documents/data-sheet/74ALVC164245.pdf, Height=1.2mm, Manufacturer_Part_Number=74ALVC164245DGG,11, Mouser Price/Stock=https://www.mouser.co.uk/ProductDetail/Nexperia/74ALVC164245DGG11/?qs=odJ8N4Y39o7U7wQRxrnAkg%3D%3D
R1 R2 R3 R4: library part RESISTOR, "Generic Resistor"
R8: library part 0R, Contributor=LCEDA_Lib, nameAlias=Value(Ω), spicePre=R, spiceSymbolName=R_0603_US
R11 R12 R15: library part 1k, Contributor=LCEDA_Lib, nameAlias=Value(Ω), spicePre=R, spiceSymbolName=R_0603_US
R16: library part 2.7k, Contributor=LCEDA_Lib, nameAlias=Value(Ω), spicePre=R, spiceSymbolName=R_0603_US
R17: library part 22k, Contributor=LCEDA_Lib, nameAlias=Value(Ω), spicePre=R, spiceSymbolName=R_0603_US
R22 R26: library part 47k, Contributor=LCEDA_Lib, nameAlias=Value(Ω), spicePre=R, spiceSymbolName=R_0603_US
U2: library part LT3083EFE#TRPBF, "LDO for 3V5", Copyright="Copyright (C) 2018 Accelerated Designs. All rights reserved", Manufacturer_Part_Number=lt3083efe#trpbf, RefDes=RefDes, Type=DEV, Vendor="Linear Technology"
U3: library part LT1764EFE#TRPBF, "LDO for 2V", Copyright="Copyright (C) 2018 Accelerated Designs. All rights reserved", Manufacturer_Part_Number=lt1764efe#trpbf, RefDes=RefDes, Type=DEV, Vendor="Linear Technology"
U4: BOM_JLCPCB SMD=Yes, BOM_Manufacturer="Linear Tech", BOM_Manufacturer Part=LT1962EMS8#PBF, BOM_Supplier=LCSC, BOM_Supplier Part=C136801, Contributor=LCSC, SMT Type=Extend, spicePre=U, spiceSymbolName=LT1962EMS8#PBF
U5: "High-Precision 1-Wire Digital Thermometer, -55 to 125 degC, 8-Pin SOP (U8+1), Pb-Free", Generic Part Number=DS18B20, Temp. Thresh.="Programmable (NV)", Code_JEDEC=MO-187, ComponentLink1Description="Manufacturer URL", ComponentLink1URL=http://www.maximintegrated.com/, ComponentLink2Description=Datasheet, ComponentLink2URL=http://datasheets.maximintegrated.com/en/ds/DS18B20.pdf, ComponentLink3Description="Package Specification", ComponentLink3URL=http://pdfserv.maximintegrated.com/package_dwgs/21-0036.PDF, DatasheetVersion="Rev. 4", Interface=1-Wire, Mounting Technology="Surface Mount", Multi Droppable=Yes, PackageDescription="8-Pin Micro-MAX, Thin Shrink Small-Outline (U8+1), Body 3 x 3 mm, Pitch 0.65 mm", PackageReference=U8+1, PackageVersion="Rev. L, 08/2009", Parasite Pwr.=Yes, PartNumber=DS18B20U+, RoHS=Pb-Free, Sensor Type=Local
U8: "8-Bit Dual-Supply Bus Transceiver with Configurable Voltage Translation and 3-State Outputs", Manufacturer="Texas Instruments", PACKAGE_DESIGNATOR=PW, Copyright="Copyright (C) 2018 Accelerated Designs. All rights reserved", Datasheet_URL=http://www.ti.com/lit/gpn/SN74AVC8T245, FAMILY_NAME="DIRECTION CONTROL DUAL SUPPLY TRANSLATOR", GENERIC_PART_NUMBER=SN74AVC8T245, INDUSTRY_STD_PKG_TYPE=TSSOP, Manufacturer_Part_Number=AVC8T245PWR-D, PIN_COUNT=24, RefDes=RefDes, Type=DEV, Vendor="Texas Instruments"
U9: "1-Bit Bidirectional Voltage-Level Translator for Open-Drain Application", Manufacturer="Texas Instruments", PACKAGE_DESIGNATOR=DRL, Copyright="Copyright (C) 2018 Accelerated Designs. All rights reserved", Datasheet_URL=http://www.ti.com/lit/gpn/TXS0101, FAMILY_NAME="AUTO DIRECTION SENSING DUAL SUPPLY TRANSLATOR", GENERIC_PART_NUMBER=TXS0101, INDUSTRY_STD_PKG_TYPE=SOT, Manufacturer_Part_Number=TXS0101DRLR, PIN_COUNT=6, RefDes=RefDes, Type=DEV, Vendor="Texas Instruments"
U11: "4-Bit Bidirectional Voltage-Level Translator for Open-Drain Applications", Manufacturer="Texas Instruments", PACKAGE_DESIGNATOR=D, Copyright="Copyright (C) 2018 Accelerated Designs. All rights reserved", Datasheet_URL=http://www.ti.com/lit/gpn/TXS0104E, FAMILY_NAME="AUTO DIRECTION SENSING DUAL SUPPLY TRANSLATOR", GENERIC_PART_NUMBER=TXS0104E, INDUSTRY_STD_PKG_TYPE=SOIC, Manufacturer_Part_Number=TXS0104ED, PIN_COUNT=14, RefDes=RefDes, Type=DEV, Vendor="Texas Instruments"
C81: Contributor=LCEDA_Lib, nameAlias=Value(F), spicePre=C, spiceSymbolName=C_0603_US
R9 R10 R13 R14 R18 R19 R20 R21 R23 R24 R25 R27 R28 R29: Contributor=LCEDA_Lib, nameAlias=Value(Ω), spicePre=R, spiceSymbolName=R_0603_US
U6 U7: spicePre=U, spiceSymbolName=LT6220IS5
U10: spicePre=U, spiceSymbolName=MAX6627MTA+T

## Free pads (board coordinates)
  round 179.92 hole 122.05: 3(196.85,196.85) 3(196.85,2559.06) 3(3346.46,196.85) 3(3346.46,2559.06)

## Via types
v1: diameter 16, hole 8, TOP to BOT, 215 vias
v2: diameter 20, hole 10, TOP to BOT, 40 vias
v3: diameter 30, hole 15, TOP to BOT, 8 vias
v4: diameter 50, hole 25, TOP to BOT, 5 vias
v5: diameter 19.7, hole 7.99, TOP to BOT, 2 vias
v6: diameter 19.7, hole 8, TOP to BOT, 2 vias
v7: diameter 22, hole 12, TOP to BOT, 1 vias

## Nets (pads, with @x,y where several pads share a name; then routed paths per layer and width w, separated by ;. In a path a pad name is that pad's centre, name@x,y a point inside that pad or via, vN(x,y) a via of type N, cw(c..) or ccw(c..) an arc to the next point about the centre after c; other vN are vias at no path point)
5V_IN: C54.2 C55.2 FEP1.A30 FEP1.B30 FEP1.C30 FEP1.D30 R13.1 U2.10 U2.11 U2.12 U2.13 U2.14 U2.15 | length 3490.9
  TOP w8: U2.15@1685.69,2431.16 1685.69,2470.31 1690.37,2475 1735,2475 1719.69,2490.31 C55.2@1719.69,2530.16
  TOP w25: v2(595,2370) v2(630,2370) ; R13.1@776.01,2353.2 707.23,2353.2 690.43,2370 v2(630,2370) ; 1770,2510 1765,2515 1765,2610.82 1750.36,2625.46 1564.64,2625.46 1550,2610.82 1550,2295 1387.58,2132.58 657.42,2132.58 630,2160 v2(630,2335) v2(630,2370)
  BOT w15: FEP1.D30@217.48,1637.8 FEP1.C30@390.71,1637.8 430.08,1637.8 551.64,1637.8 ; v2(630,2335) 630,1716.16 551.64,1637.8 ; FEP1.A30@784.41,1637.8 FEP1.B30@611.18,1637.8 551.64,1637.8
  other v2: 595,2335
+4.5V: C70.2 C71.2 C75.2 C76.2 R14.2 R17.2 R22.2 U6.5 U7.5 | length 5445.2
  TOP w20: v4(656.25,2638.75) 657.5,2637.5 1302.5,2637.5 ; R14.2@1302.5,2486.19 1302.5,2637.5 ; U7.5@2524.55,2476 2524.55,2577.85 2518.05,2584.35 2576.34,2584.35 C75.2@2576.55,2584.13 ; R22.2@2586.55,2018.5 2913.28,2018.5 ; R17.2@3060.39,1119.37 3060.39,1054.42 3072.11,1042.7 3401.9,1042.7 3413.61,1054.42 3413.61,1469.65 3310.08,1573.19 ; C71.2@3106.89,1553.94 3166.89,1553.94 ; U6.5@3161.67,1478.75 3161.67,1548.71 3166.89,1553.94 ; 1302.5,2637.5 1355,2690 2260,2690 2365.43,2584.57 C76.2@2486.55,2584.57 2690.43,2584.57 2925,2350 2925,2030.22 2913.28,2018.5 ; 2913.28,2018.5 3006.79,1925 3231.89,1925 3321.89,1835 3321.89,1585 3310.08,1573.19 ; 3166.89,1553.94 C70.2@3191.89,1553.94 3290.83,1553.94 3310.08,1573.19
AD_20D: C58.1 C59.2 C60.2 C61.2 C62.2 C63.2 C64.2 R9.1 R11.2 U3.3 U3.4 U3.5 | length 1205.4
  BOT w15: R9.1@2795.03,2126.46 C61.2@2887,2126.46 ; R11.2@2870,2335 2870,2143.47 C61.2@2887,2126.46 ; C61.2@2890,2125.43 2888.03,2125.43 C61.2@2887,2126.46 ; U3.5@3058.2,2354 U3.4@3083.8,2354 U3.3@3109.4,2354 3109.4,2214.4 3075,2180 C64.2@3075,2126.43 ; C62.2@3330,2126.43 C64.2@3075,2126.43 ; C62.2@3330,2126.49 3330,2161.21 3338.79,2170 C58.1@3450,2170 ; C61.2@2887,2126.46 C64.2@3075,2126.43
AD_PIXLDC: C77.1 C78.2 R23.2 R24.1 | length 316.1
  TOP w12: C77.1@2415,2301 2415,2247.34 2422.03,2240.31 R23.2@2511.55,2240.31 C78.2@2511.55,2165 2501.55,2155 R24.1@2501.55,2081.49
AD_VRH: C72.1 C73.2 R18.2 R19.1 | length 362.1
  TOP w20: C72.1@2965.89,1420.92 2981.81,1405 3011.89,1405 3041.89,1375 R18.2@3086.89,1375 3088.7,1373.19 3088.7,1242.13 C73.2@3091.46,1239.37 R19.1@3006.89,1239.37
C_INIT_B: IC2.5 U1.L18 | length 1420.4
  Sig2 w6: v1(1306.49,1966.34) 1285,1987.83 1285,2080 1325,2120 2127.86,2120 2290.35,1957.51 U1.L18@2290.35,1802.95
  BOT w6: v1(1306.49,1966.34) 1358.62,1966.34 IC2.5@1360,1964.96
C_INIT_B_25: FEP1.D25 IC2.44 | length 1521.9
  Sig2 w6: v1(60.35,1485.08) 60.35,1735.35 309.59,1984.59 v1(993.21,1984.59)
  BOT w6: v1(60.35,1485.08) 67.16,1478.27 215.43,1478.27 FEP1.D25@217.48,1480.32 ; v1(993.21,1984.59) 1012.84,1964.96 IC2.44@1059.84,1964.96
C_INIT_T: IC2.6 U1.M17 | length 1120.2
  TOP w6: v1(1483.38,1951.76) 2230.33,1951.76 2315.29,1866.79 2315.29,1773.22 2335.56,1752.95 U1.M17@2340.35,1752.95
  BOT w6: IC2.6@1360,1945.28 1417.14,1945.28 1423.62,1951.76 v1(1483.38,1951.76)
C_INIT_T_25: FEP1.D24 IC2.43 | length 1446.5
  Sig2 w6: v1(102.09,1453.06) 102.09,1726.81 328.75,1953.46 v1(979.51,1953.46)
  BOT w6: v1(102.09,1453.06) 211.96,1453.06 212.6,1453.7 FEP1.D24@217.48,1448.82 ; v1(979.51,1953.46) 981.69,1953.46 989.88,1945.28 IC2.43@1059.84,1945.28
CLKIN_N: FEP1.B13 R1.2 U1.P17 | length 2909.4
  Sig1 w5: v1(531.92,1102.68) 529.82,1104.78 529.82,1109.75 525.52,1114.05 518.26,1114.05 496.3,1136.01 496.3,1517.15 561,1581.85 561,1743.73 706.27,1889 1387.91,1889 1388.41,1889.5 1452.07,1889.5 1455,1892.43 ; v1(1455,1905) 1455,1892.43 ; U1.P17@2440.35,1752.95 2422.78,1752.95 2419.85,1755.88 2419.85,1852.87 2416.36,1856.36 2383.73,1889 1509.75,1889 1509.25,1889.5 1457.93,1889.5 1455,1892.43
  BOT w5: v1(531.92,1102.68) 532.23,1102.68 542.06,1112.51 560.46,1112.51 566.44,1106.54 566.44,1106.36 570.44,1102.36 FEP1.B13@611.18,1102.36 ; v1(1455,1905) 1455,1892.43 1457.93,1889.5 1487.76,1889.5 1490.69,1892.43 1490.69,1895.37 R1.2@1500,1904.69
CLKIN_P: FEP1.B14 R1.1 U1.N17 | length 2865.7
  Sig1 w5: v1(532.53,1134.42) 530.43,1132.32 530.43,1127.35 526.13,1123.05 521.98,1123.05 505.3,1139.73 505.3,1513.42 570,1578.12 570,1740 710,1880 1391.64,1880 1392.14,1880.5 1452.07,1880.5 1455,1877.57 ; v1(1455,1865) 1455,1877.57 ; U1.N17@2390.35,1752.95 2407.93,1752.95 2410.85,1755.88 2410.85,1849.15 2380,1880 1506.02,1880 1505.52,1880.5 1457.93,1880.5 1455,1877.57
  BOT w5: v1(532.53,1134.42) 532.53,1134.12 543.6,1123.05 560.24,1123.05 568.52,1131.34 608.66,1131.34 FEP1.B14@611.18,1133.86 ; v1(1455,1865) 1455,1877.57 1457.93,1880.5 1487.76,1880.5 1490.69,1877.57 1490.69,1874.63 R1.1@1500,1865.32
CLKOUT_N: FEP1.B15 U1.B17 | length 2857.7
  Sig1 w5: v1(528.95,1183.43) 529.1,1183.43 538.27,1192.59 557.59,1192.59 615,1250 615,1717.96 615,1725 616.42,1726.42 ; 616.44,1726.44 623.76,1733.76 cw(c627.32,1730.25) 630.87,1733.77 665.3,1699.33 ccw(c675.23,1709.2) 685.11,1719.13 ; 667.06,1790.92 cw(c670.58,1794.47) 674.13,1797.99 719.04,1753.07 ccw(c728.97,1762.94) 738.85,1772.87 704.41,1807.3 ; 667.06,1790.91 711.98,1746 cw(c702.1,1736.07) 712,1726.17 cw(c702.1,1736.07) 692.17,1726.2 647.27,1771.11 ccw(c643.71,1767.6) 640.19,1764.05 685.11,1719.13 ; 704.41,1807.31 cw(c707.93,1810.86) 704.39,1814.39 ; 704.42,1814.42 709.34,1819.34 716,1826 932.22,1826 984.76,1773.45 1584.69,1773.45 1591.69,1773.45 ccw(c1591.69,1787.45) 1605.69,1787.45 1605.69,1830.2 cw(c1610.69,1830.2) 1615.69,1830.2 1615.69,1748.46 ccw(c1629.69,1748.46) 1643.69,1748.46 1643.69,1830.2 cw(c1648.69,1830.2) 1653.69,1830.2 1653.69,1748.46 ccw(c1667.69,1748.46) 1681.69,1748.46 1681.69,1812.6 cw(c1686.69,1812.6) 1691.69,1812.6 1691.69,1787.45 ccw(c1705.69,1787.45) 1705.69,1773.45 1729.45,1773.45 1837.43,1773.45 1840.35,1770.52 U1.B17@1840.35,1752.95
  BOT w5: v1(528.95,1183.43) 528.95,1184.16 537.38,1192.59 541.52,1192.59 544.78,1189.34 544.78,1184.8 552.98,1176.6 563.51,1176.6 566.44,1173.67 566.44,1170.73 571.81,1165.35 FEP1.B15@611.18,1165.35
CLKOUT_P: FEP1.B16 U1.B18 | length 2857.2
  Sig1 w5: v1(529.26,1210.75) 529.26,1210.6 538.27,1201.59 553.86,1201.59 606,1253.73 606,1726.96 606,1728.73 610.05,1732.78 ; 610.08,1732.81 617.39,1740.12 cw(c627.32,1730.25) 637.24,1740.12 671.67,1705.69 ccw(c675.23,1709.2) 678.75,1712.76 633.84,1757.67 cw(c643.71,1767.6) 653.63,1777.47 698.54,1732.56 ccw(c702.1,1736.07) 705.62,1732.52 ; 705.65,1732.55 ccw(c702.1,1736.07) 705.62,1739.63 660.71,1784.54 cw(c670.58,1794.47) 680.5,1804.34 725.41,1759.43 ccw(c728.97,1762.94) 732.49,1766.5 698.06,1800.93 cw(c707.93,1810.86) 698.05,1820.78 702.98,1825.71 712.27,1835 935.94,1835 988.49,1782.45 1584.69,1782.45 1591.69,1782.45 ccw(c1591.69,1787.45) 1596.69,1787.45 1596.69,1830.2 cw(c1610.69,1830.2) 1624.69,1830.2 1624.69,1748.46 ccw(c1629.69,1748.46) 1634.69,1748.46 1634.69,1830.2 cw(c1648.69,1830.2) 1662.69,1830.2 1662.69,1748.46 ccw(c1667.69,1748.46) 1672.69,1748.46 1672.69,1812.6 cw(c1686.69,1812.6) 1700.69,1812.6 1700.69,1787.45 ccw(c1705.69,1787.45) 1705.69,1782.45 1729.45,1782.45 1837.43,1782.45 1840.35,1785.38 U1.B18@1840.35,1802.95
  BOT w5: v1(529.26,1210.75) 529.26,1210.02 537.69,1201.59 545.25,1201.59 553.78,1193.07 553.78,1188.53 556.7,1185.6 563.51,1185.6 566.44,1188.53 566.44,1191.48 571.81,1196.85 FEP1.B16@611.18,1196.85
CPC: U1.F18 U8.8 | length 1402.4
  Sig2 w6: v1(1235.92,1318.37) 1235.92,1340.07 1283.39,1387.53 1283.39,1725.58 1327.81,1770 1601.73,1770 1690.28,1858.55 1984.75,1858.55 U1.F18@2040.35,1802.95
  BOT w6: v1(1235.92,1318.37) 1235.92,1270.97 1255.27,1251.61 U8.8@1321,1251.61
CPC_25: FEP1.C22 U8.16 | length 808.6
  Sig2 w6: v1(468.56,1372.73) 507.27,1372.73 631.3,1248.7 631.3,1227.92 659.62,1199.59 967.3,1199.59 985.71,1218 v1(1033.47,1218)
  BOT w6: FEP1.C22@390.71,1385.83 453.6,1385.83 466.7,1372.73 v1(468.56,1372.73) ; v1(1033.47,1218) 1045.48,1218 1053.5,1226.02 U8.16@1099,1226.02
CS: U10.6 U11.11 | length 242
  BOT w6: U11.11@1302,265 1485,265 1502,282 U10.6@1537,282
CS_25: FEP1.D9 U11.4 | length 1561.1
  Sig2 w6: v1(131.99,976.38) 85,929.39 85,740 560,265 v1(1056,265)
  BOT w6: v1(131.99,976.38) FEP1.D9@217.48,976.38 ; v1(1056,265) U11.4@1108,265
DIO_N: C81.1 U1.P16 U10.2 | length 3206.5
  BOT w6: U10.2@1653,308 1683,308 1735,360 C81.1@1804.57,360 1804.57,275.43 1830,250 2600,250 3110,760 3110,1195 3020,1285 2775,1285 2630,1430 2630,1608.53 2558.53,1680 2460,1680 2440.35,1699.65 U1.P16@2440.35,1702.95
DIO_P: C81.2 U1.N16 U10.3 | length 3192.7
  TOP w6: v1(1698,282) 1698,383 1735,420 v1(1875,420)
  BOT w6: U10.3@1653,282 v1(1698,282) v1@1700,280 ; v1(1875,420) 1875,360.43 C81.2@1875.43,360 2605,360 3045,800 3045,1145 2950,1240 2635,1240 2590,1285 2590,1595 2555,1630 2418.51,1630 2415,1633.51 2415,1680 2392.05,1702.95 U1.N16@2390.35,1702.95
DQ: U5.1 U8.9 | length 961.8
  BOT w6: U8.9@1321,1226.02 1399.87,1226.02 1651.91,1478.07 2012.59,1478.07 2039.52,1505 2120,1505 2124.73,1500.27 2124.73,1462.87 U5.1@2126.97,1460.63
DQ_25: FEP1.D12 U8.15 | length 1292.2
  Sig2 w6: v1(144.13,1072.6) 180.64,1072.6 361.72,1253.68 561.32,1253.68 639.46,1175.54 1122.07,1175.54 v1(1164.53,1218)
  BOT w6: v1(144.13,1072.6) 215.75,1072.6 FEP1.D12@217.48,1070.87 ; U8.15@1099,1200.43 1139.72,1200.43 1157.29,1218 v1(1164.53,1218)
FPGA_EN: IC2.14 U4.5 | length 1040.5
  TOP w6: v1(870,2435) v1@870.8,2435.8 ; U4.5@924,2436.59 923.2,2435.8 v1@872.39,2435.8 ; v1@870.8,2435.8 v1@872.39,2435.8 ; v1@870.8,2435.8 871.59,2436.59 v1@872.39,2435.8
  BOT w6: v1(870,2435) 1010,2435 1025,2420 1025,2340 1218.39,2146.61 1218.39,1841.61 1272.2,1787.8 IC2.14@1360,1787.8
FPGA_EN_25: FEP1.C20 IC2.35 | length 1225.9
  TOP w6: v1(470,1305) 498.08,1333.08 498.08,1389.61 590.21,1481.74 590.21,1650.21 650,1710 952.6,1710 1012.6,1770 1109.1,1770 v1(1156.42,1817.32)
  BOT w6: FEP1.C20@390.71,1322.83 452.17,1322.83 v1(470,1305) ; IC2.35@1059.84,1787.8 1107.64,1787.8 1137.16,1817.32 v1(1156.42,1817.32)
GND: C1.1 C2.1 C3.1 C4.1 C5.2 C6.1 C7.1 C8.1 C9.1 C10.1 C11.1 C12.1 C13.1 C14.1 C15.1 C16.1 C17.2 C18.1 C19.1 C20.1 C21.1 C22.1 C23.2 C24.1 C25.1 C26.1 C27.1 C28.1 C29.2 C30.1 C31.1 C32.1 C33.1 C34.1 C35.1 C36.1 C37.1 C38.2 C40.2 C41.2 C42.2 C43.2 C44.2 C45.2 C46.2 C47.2 C51.2 C52.2 C53.2 C54.1 C55.1 C56.1 C57.1 C58.2 C59.1 C60.1 C61.1 C62.1 C63.1 C64.1 C65.1 C66.1 C68.2 C69.1 C70.1 C71.1 C72.2 C73.1 C74.1 C75.1 C76.1 C77.2 C78.1 C79.1 C80.1 C82.1 C83.1 C84.1 C85.1 C86.1 FEP1.A1 FEP1.A10 FEP1.A19 FEP1.A28 FEP1.A29 FEP1.B1 FEP1.B10 FEP1.B19 FEP1.B28 FEP1.B29 FEP1.C1 FEP1.C10 FEP1.C19 FEP1.C28 FEP1.C29 FEP1.D1 FEP1.D10 FEP1.D19 FEP1.D28 FEP1.D29 IC1.4 IC1.10 IC1.15 IC1.21 IC1.25 IC1.28 IC1.34 IC1.39 IC1.45 IC1.48 IC2.4 IC2.10 IC2.15 IC2.21 IC2.25 IC2.28 IC2.34 IC2.39 IC2.45 IC2.48 pad.3 R2.2 R3.2 R4.2 R8.1 R12.1 R16.1 R21.1 R26.1 R27.1 R28.1 U1.C1 U1.C8 U1.C9 U1.C10 U1.C11 U1.E1 U1.E18 U1.H2 U1.M1 U1.M18 U1.P1 U1.P18 U3.1 U3.7 U3.8 U3.9 U3.16 U3.EPAD U4.4 U5.4 U6.2 U7.2 U8.2 U8.11 U8.12 U8.13 U9.2 U10.1 U10.9 U11.7 | length 12798.1
  TOP w6: v1(869.06,413.85) 912.53,413.85 912.76,413.62 U9.2@913.82,414.69
  TOP w10: v2(870,355) 890,335 R27.1@915.31,335 ; v1@1384.21,2359.21 v1(1385,2360)
  TOP w15: C69.1@840,2195 v1(895,2195) ; v1(1046.59,2436.59) U4.4@1121,2436.59 ; R16.1@1337.47,2359.21 v1@1384.21,2359.21 ; C68.2@1463.37,2423.2 1463.37,2366.9 v1(1464.18,2366.09) ; C55.1@1648.82,2530.16 1649.79,2531.13 v1(1649.79,2579.35) ; C54.1@1879.69,2530.16 v1(1939.84,2530.16) v1@1940,2530 ; C57.1@1949.37,2430.16 1989.84,2430.16 v1(1990,2430) ; C56.1@2100.12,2019.61 2098.15,2021.58 2098.15,2098.19 R8.1@2096.18,2100.16 2096.18,2151.21 2104.96,2160 v2(2145,2160) ; C77.2@2415,2430 v1(2415,2505) ; v1(2485,2705) 2485,2656.98 C76.1@2486.55,2655.43 ; U7.2@2561.55,2374 2561.55,2253.45 v2(2585,2230) 2585,2167.58 C78.1@2582.42,2165 ; v1(2575,2705) 2575,2656.55 C75.1@2576.55,2655 ; R26.1@2738.04,2075 2740,2076.96 2726.24,2090.72 2727.16,2091.64 v2(2727.16,2127.25) 2728.12,2128.21 2740.37,2128.21 2761.55,2149.39 C79.1@2761.55,2184.57 ; C72.2@2965.89,1549.92 v1(2965.89,1624) ; v1(3059.49,1624.8) C71.1@3106.89,1624.8 ; C73.1@3162.32,1239.37 3162.32,1296.65 3169.96,1304.28 3172.19,1304.28 3198.67,1330.76 U6.2@3198.67,1376.75 ; C70.1@3191.89,1624.8 v1(3240.03,1624.8) ; R21.1@3273.38,1119.37 3326.26,1119.37 v2(3334.07,1127.19) 3341.89,1135 C74.1@3341.89,1213.94
  BOT w6: v1(104.11,1291.34) 214.54,1291.34 216.01,1289.87 FEP1.D19@217.48,1291.34 ; v1(128.86,1604.64) 215.82,1604.64 FEP1.D29@217.48,1606.3 ; v1(143.15,724.67) 217.22,724.67 FEP1.D1@217.48,724.41 ; v1(150.33,1008.1) 217.25,1008.1 FEP1.D10@217.48,1007.87 ; v1(157.24,1574.8) FEP1.D28@217.48,1574.8 ; v1(305.22,1291.34) FEP1.C19@390.71,1291.34 ; v1(330.46,1007.87) FEP1.C10@390.71,1007.87 ; FEP1.C1@390.71,724.41 390.88,724.24 391.26,724.62 v1(457.14,724.62) ; FEP1.C28@390.71,1574.8 v1(460.84,1574.82) ; FEP1.C29@390.71,1606.3 391.3,1606.89 404.87,1593.33 v1(495.72,1593.33) ; v1(542.1,1007.54) 610.85,1007.54 FEP1.B10@611.18,1007.87 ; v1(545.02,1291.27) FEP1.B19@600,1291.27 ; v1(927.26,1781.32) 972.68,1781.32 985.89,1768.11 IC2.34@1059.84,1768.11 ; v1(1005.34,617.19) 1059.43,617.19 IC1.28@1059.92,617.68 ; v1(1008.88,2044.01) 1059.53,2044.01 IC2.48@1059.84,2043.7 ; IC2.39@1059.84,1866.54 1097.79,1866.54 1111.01,1853.32 v1(1120.42,1853.32) ; IC2.45@1059.84,1984.65 1060.85,1983.64 v1(1111.56,1983.64) ; IC1.25@1059.92,558.62 1060.16,558.38 v1(1109.88,558.38) ; IC1.39@1059.92,834.21 1060.36,833.77 v1(1108.78,833.77) ; IC2.25@1070,1591.78 v1(1118.46,1591.78) ; U11.7@1108,415 v1(1160,415) ; v1(1290.39,737.49) 1291.24,736.64 1359.23,736.64 IC1.15@1360.08,735.79 ; v1(1304.22,619.9) 1357.86,619.9 IC1.21@1360.08,617.68 ; IC2.4@1360,1984.65 v1(1408.05,1984.64) ; IC1.10@1360.08,834.21 1360.72,833.57 v1(1408.73,833.57)
  BOT w8: IC1.45@1059.92,952.32 1145.5,952.32 1163.05,969.88 v1(1163.05,1010.91) ; 1920,845.47 1925,840.47 v2(1925,785) ; v2(2020,785) C47.2@2020,845.31 ; U5.4@2203.74,1460.63 2203.74,1508.74 2224.09,1529.09 v2(2290.41,1529.09) ; v2(2280,1610) C1.1@2280,1645 ; C15.1@2305.31,1420 2305.31,1469.69 2310.63,1475 2343.27,1475 C3.1@2344.17,1475.91
  BOT w10: FEP1.B28@611.18,1574.8 676.37,1574.8 v3@693.42,1591.85 ; FEP1.B29@611.18,1606.3 673.7,1606.3 688.15,1591.85 v3@693.42,1591.85 ; FEP1.A29@784.41,1606.3 718.69,1606.3 v3@704.24,1591.85 ; v2(915.42,114.66) 954.66,114.66 C82.1@955,115 ; C86.1@960.31,1410 C85.1@960.31,1465 960.31,1559.69 945.2,1574.8 FEP1.A28@784.41,1574.8 721.28,1574.8 v3@704.24,1591.85 ; IC2.25@1059.84,1590.94 1058.94,1590.04 1014.62,1590.04 1008.76,1595.9 1008.76,1644.14 1014.62,1650 IC2.28@1059.84,1650 ; IC1.34@1059.92,735.79 1152.11,735.79 v1(1190.82,697.07) ; IC1.48@1059.92,1011.38 1060.16,1011.14 1162.82,1011.14 v1(1163.05,1010.91) ; U8.13@1099,1149.25 U8.12@1321,1149.25 ; v1(1249.82,982.63) 1280.12,952.32 IC1.4@1360.08,952.32 ; U8.11@1321,1174.84 U8.12@1321,1149.25 ; U8.2@1321,1405.16 1390.16,1405.16 1465,1480 1465,1644.14 1459.14,1650 IC2.21@1360,1650 ; IC2.15@1360,1768.11 1422.01,1768.11 1463.9,1810 ; IC2.10@1360,1866.54 1418.02,1866.54 1424.06,1860.5 v1(1425.68,1860.5) 1425.68,1848.22 1463.9,1810 ; C84.1@1415,1119.69 1415,1149.25 ; C83.1@1449.69,120 1451.19,121.51 v2(1451.19,153.29) ; v1(1551.49,1176.73) 1524.01,1149.25 1415,1149.25 ; C80.1@1567.14,182.66 C80.1@1569.53,185.04 ; C80.1@1574.57,180 1574.57,239.17 v5(1595,259.6) ; R28.1@1603.51,415 1595,406.49 v6(1595,330.4) 1618.07,330.4 1620.67,333 U10.1@1653,333 ; C10.1@1685.31,1865 C13.1@1685.31,1810 1463.9,1810 ; C29.2@1775,630 1775,754.85 1790.41,770.26 C11.1@1790.41,841.05 ; v1(1815,2075) 1815,2017.75 1835.04,1997.71 C6.1@1840.71,1997.71 ; R4.2@1840.71,1919.76 C6.1@1840.71,1997.71 ; v1(1855,2075) 1855,2012 C6.1@1840.71,1997.71 ; U1.C8@1890.35,1302.95 1962.05,1302.95 1980.86,1284.14 1980.86,1235.86 C45.2@1980,1235 ; v1(2000,1150) 2000,1102.73 C38.2@2000.71,1102.02 ; v2(2340,595) C24.1@2340,670 ; C40.2@2340.48,1102.02 2385.39,1102.02 2388.38,1105 v1(2390,1105) ; U1.P1@2440.35,952.95 2442.05,952.95 2495,900 2495,836.84 ; C9.1@2659.69,1740 R3.2@2659.69,1690 2660,1689.69 v1(2660,1650) ; v3@693.42,1591.85 v3(698.83,1591.85) v3@704.24,1591.85 ; U8.12@1321,1149.25 1415,1149.25
  BOT w15: v1(544.02,724.22) 609.82,724.22 610.59,725 FEP1.B1@611.18,724.41 ; FEP1.B19@600,1291.27 600.07,1291.34 FEP1.B19@611.18,1291.34 FEP1.A19@784.41,1291.34 ; v1(716.34,1014.86) 716.61,1014.86 723.23,1008.25 784.04,1008.25 FEP1.A10@784.41,1007.87 ; FEP1.A1@784.41,724.41 v1(869.9,724.41) ; C29.2@1775,630 1775.74,629.26 v2(1775.74,521.57) ; R4.2@1840.71,1919.76 1840.96,1920.02 2005.45,1920.02 C26.1@2005.71,1920.28 ; C19.1@1900,845.63 1900.16,845.47 1920,845.47 1954.84,845.47 C21.1@1955,845.32 C47.2@2020,845.31 ; R2.2@1942.11,1609.52 1991.21,1609.52 2000,1618.31 2000,1653.86 C53.2@2000.71,1654.57 C41.2@2066.16,1654.57 2105,1654.57 ; v2(2100,1615) 2100,1649.57 2105,1654.57 ; C46.2@2135,845 2135.16,845.16 2399.84,845.16 C27.1@2400,845.32 2400.16,845.47 2454.84,845.47 C25.1@2455,845.63 2486.21,845.63 2495,836.84 v2(2495,810) ; C36.1@2197.07,1654.57 2105,1654.57 ; C34.1@2205,1914.69 C32.1@2265,1914.69 2317.64,1914.69 2323.38,1920.43 v2(2324.73,1920.43) ; C51.2@2228.59,1102.02 C42.2@2283.86,1102.02 C40.2@2340.48,1102.02 ; C1.1@2280,1645 2337.64,1645 C4.1@2343.54,1650.91 2343.86,1650.59 C3.1@2343.86,1476.22 ; v2(2290.41,1529.09) 2291.76,1529.09 2293.57,1530.91 C2.1@2343.54,1530.91 ; v2(2335,2265) 2335,2174.84 C23.2@2355.4,2154.45 2480.61,2154.45 2501.55,2133.5 2501.55,2028.45 2505,2025 2465,2025 2446,2006 C35.1@2364,2006 2364,1956 2375,1945 C20.1@2375,1914.69 C22.1@2430,1914.69 ; v2(2650.08,1020.42) 2650.08,956.22 C7.1@2650.39,955.91 C12.1@2650.39,900.91 ; C9.1@2659.69,1740 C8.1@2659.69,1795 C14.1@2659.69,1850 ; C30.1@2779.71,806.91 2779.71,864.71 v2(2780,865) ; v2(2808.13,2543.57) 2808.32,2543.39 2808.32,2490.19 R12.1@2808.51,2490 ; C17.2@2860,1430 v2(2860,1540) ; C65.1@2865.43,1970 2869.62,1974.18 2869.62,2005.37 2885.42,2021.17 2885.42,2049.99 C61.1@2890,2054.57 2890.5,2055.07 2984.5,2055.07 C59.1@2985,2055.57 2985.57,2055 3106.5,2055 ; U3.8@2981.4,2354 U3.7@3007,2354 3007,2413.94 3030,2436.94 v3(3030,2441) ; U3.9@2981.4,2576 2981.4,2494.79 2990.19,2486 v3(3031.21,2486) ; v2(3110,1995) 3110,2051.5 3106.5,2055 ; v3(3116.21,2441) 3119.08,2438.13 3151.81,2438.13 3160.6,2429.34 U3.1@3160.6,2354 ; v3(3116.21,2486) 3117.21,2485 3151.81,2485 3160.6,2493.79 U3.16@3160.6,2576 ; C60.1@3160,2055.57 C60.1@3160.57,2055 ; C5.2@3170,1795 3165,1800 v2(3165,1995) 3164.04,1995.96 3164.04,2051.52 C60.1@3160.57,2055 ; v2(3220,1995) 3220,2055 ; v2(3444.8,2372.64) 3445.11,2372.32 3445.11,2315.32 C66.1@3445.43,2315 ; C58.2@3450,2041 3399,2041 3385,2055 3220,2055 ; 3106.5,2055 C60.1@3160.57,2055 ; C60.1@3160.57,2055 3220,2055
  other v1: 1465,1605
  other v2: 3169,1303.32
  other v3: 3076.21,2441 3076.21,2486
  other v5: 1575.3,295
  other v6: 1614.7,295
GNDA: R4.1 U1.C18 | length 98
  BOT w12: R4.1@1840.71,1880.39 1840.71,1852.6 U1.C18@1890.35,1802.95
HDR: U1.C12 U8.7 | length 815.7
  Sig2 w6: v1(1265.41,1277.39) 1315.71,1227.08 1472.08,1227.08 1723.11,1478.11 1865.51,1478.11 U1.C12@1890.35,1502.95
  BOT w6: v1(1265.41,1277.39) 1320.82,1277.39 U8.7@1321,1277.2
HDR_25: FEP1.C23 U8.17 | length 1041.6
  Sig2 w6: v1(464.84,1413.25) 525.03,1413.25 659.55,1278.73 891.27,1278.73 921.85,1248.15 1170.38,1248.15 v1(1200.53,1218)
  BOT w6: FEP1.C23@390.71,1417.32 394.78,1413.25 v1(464.84,1413.25) ; U8.17@1099,1251.61 1140.49,1251.61 1157.49,1268.61 1183.53,1268.61 1200.53,1251.61 v1(1200.53,1218)
LDC_IN: IC2.12 U1.P15 | length 1289.3
  Sig2 w6: v1(1408.72,1825.96) 1540.53,1825.96 1599.57,1885 2080,1885 2116.53,1848.47 2116.53,1698.47 2162.05,1652.95 U1.P15@2440.35,1652.95
  BOT w6: IC2.12@1360,1827.17 1361.2,1825.96 v1(1408.72,1825.96)
LDC_IN_25: FEP1.D20 IC2.37 | length 1375.5
  TOP w6: v1(141.56,1321.84) 186.79,1321.84 317.78,1452.84 317.78,1567.78 580,1830 1101,1830 1103.29,1827.71 1108.31,1827.71 v1(1110.23,1825.8)
  BOT w6: v1(141.56,1321.84) 216.49,1321.84 FEP1.D20@217.48,1322.83 ; IC2.37@1059.84,1827.17 1061.21,1825.8 v1(1110.23,1825.8)
NetC56_2: C56.2 R8.2 U2.7 | length 387
  TOP w15: U2.7@1813.69,2209.16 1813.19,2208.66 1813.19,2141.81 1854.84,2100.16 R8.2@2033.19,2100.16 2031.22,2098.19 2031.22,2021.58 C56.2@2029.25,2019.61
NetC66_2: C66.2 R10.2 U3.10 U3.12 U3.13 U3.14 | length 890.8
  BOT w15: U3.10@3007,2576 3007,2626.21 3015.79,2635 3049.41,2635 3058.2,2626.21 U3.12@3058.2,2576 U3.13@3083.8,2576 U3.14@3109.4,2576 3109.4,2659.13 3118.19,2667.91 3177.09,2667.91 3213.21,2631.79 3213.21,2322.29 3222,2313.51 R10.2@3295,2313.51 3295.75,2314.25 3373.82,2314.25 C66.2@3374.57,2315
NetC67_1: C67.1 C68.1 R14.1 R15.2 U4.1 | length 331.1
  TOP w10: U4.1@1121,2359.82 1121.59,2360.41 1201.29,2360.41 R15.2@1201.88,2361 1202.19,2361.31 1202.19,2418.21 C67.1@1202.5,2418.52 1297.81,2418.52 R14.1@1302.5,2423.2 C68.1@1392.5,2423.2
NetC67_2: C67.2 U4.3 | length 122.1
  TOP w10: U4.3@1121,2411 1159.14,2411 1165,2416.86 1165,2450 1175,2460 1200.39,2460 C67.2@1202.5,2457.89
NetC69_2: C69.2 R13.2 U4.8 | length 188.5
  TOP w15: C69.2@840,2265.87 839.5,2266.37 839.5,2352.7 R13.2@839,2353.2 845.11,2359.32 923.5,2359.32 U4.8@924,2359.82 ; C69.2@840.75,2265.87 840.75,2255.39 C69.2@842.5,2253.64
NetC74_2: C74.2 R20.2 U6.3 | length 185.1
  TOP w12: U6.3@3235.67,1376.75 3235.67,1364 3256.89,1342.78 3256.89,1285.87 3257.95,1284.8 C74.2@3341.89,1284.8
NetC79_2: C79.2 R25.2 U7.3 | length 268.4
  TOP w15: U7.3@2598.55,2374 2636,2374 2671.55,2338.45 R25.2@2671.55,2250 2674.27,2252.72 2758.83,2252.72 C79.2@2761.55,2255.43
NetR11_1: R11.1 R12.2 U3.6 | length 401.8
  BOT w15: R11.1@2870,2397.99 R11.1@2870.75,2398.74 ; R12.2@2871.49,2490 2870.75,2489.25 R11.1@2870.75,2398.74 ; U3.6@3032.6,2354 3032.6,2307.6 3015,2290 2945,2290 2925,2310 2925,2391.21 2916.21,2400 2872.01,2400 R11.1@2870.75,2398.74
NetR15_1: R15.1 R16.2 U4.2 | length 376
  TOP w10: U4.2@1121,2385.41 1075.41,2385.41 1065,2375 1065,2335 1085,2315 1220,2315 1241.25,2336.25 R15.1@1241.25,2361 1242.15,2360.1 1297.2,2360.1 R16.2@1298.1,2359.21